# Altium PCB DE-020717.PcbDoc (part 1 of 3)
Units mil, origin at the board's own origin, x right, y up, seen from the top; angles counter-clockwise.
Board outline 2598.43 x 2598.43 mil, 4 copper layers (Top Layer, Power, Ground, Bottom Layer), stack 30.668 mil thick; 178 components, 180 nets, 707 pads, 289 vias.
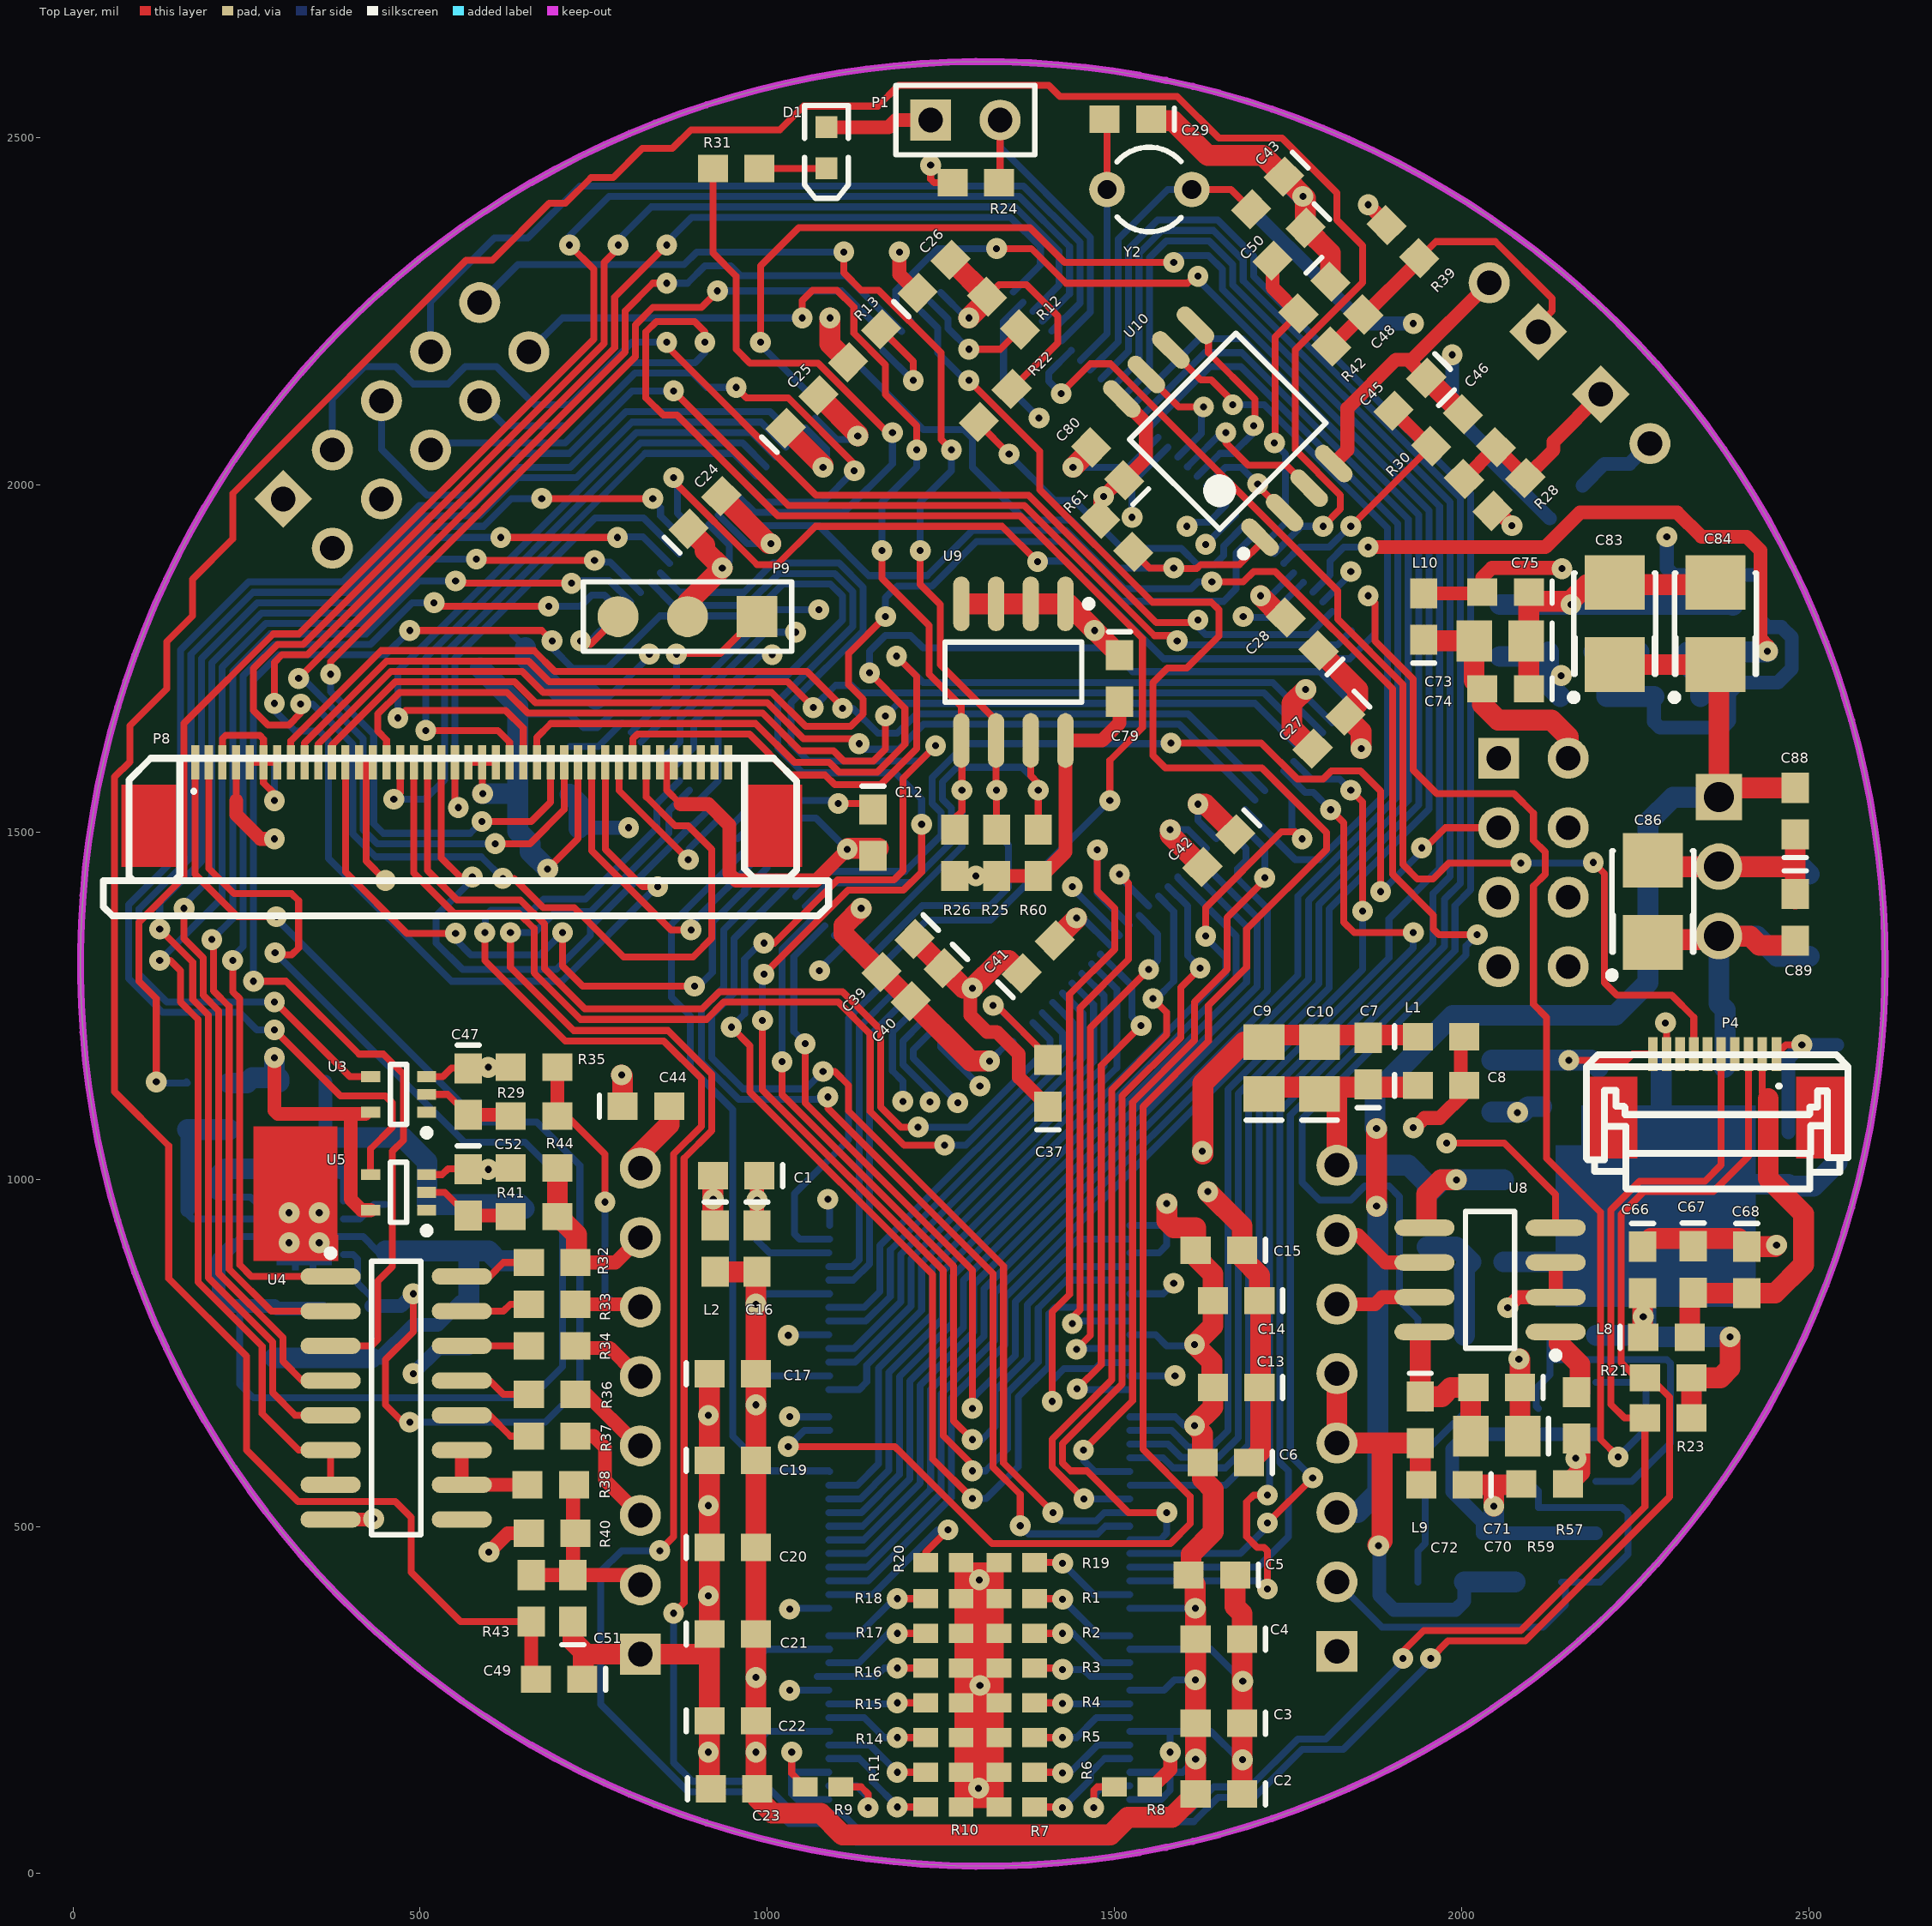
[diagram p0: Top Layer view]
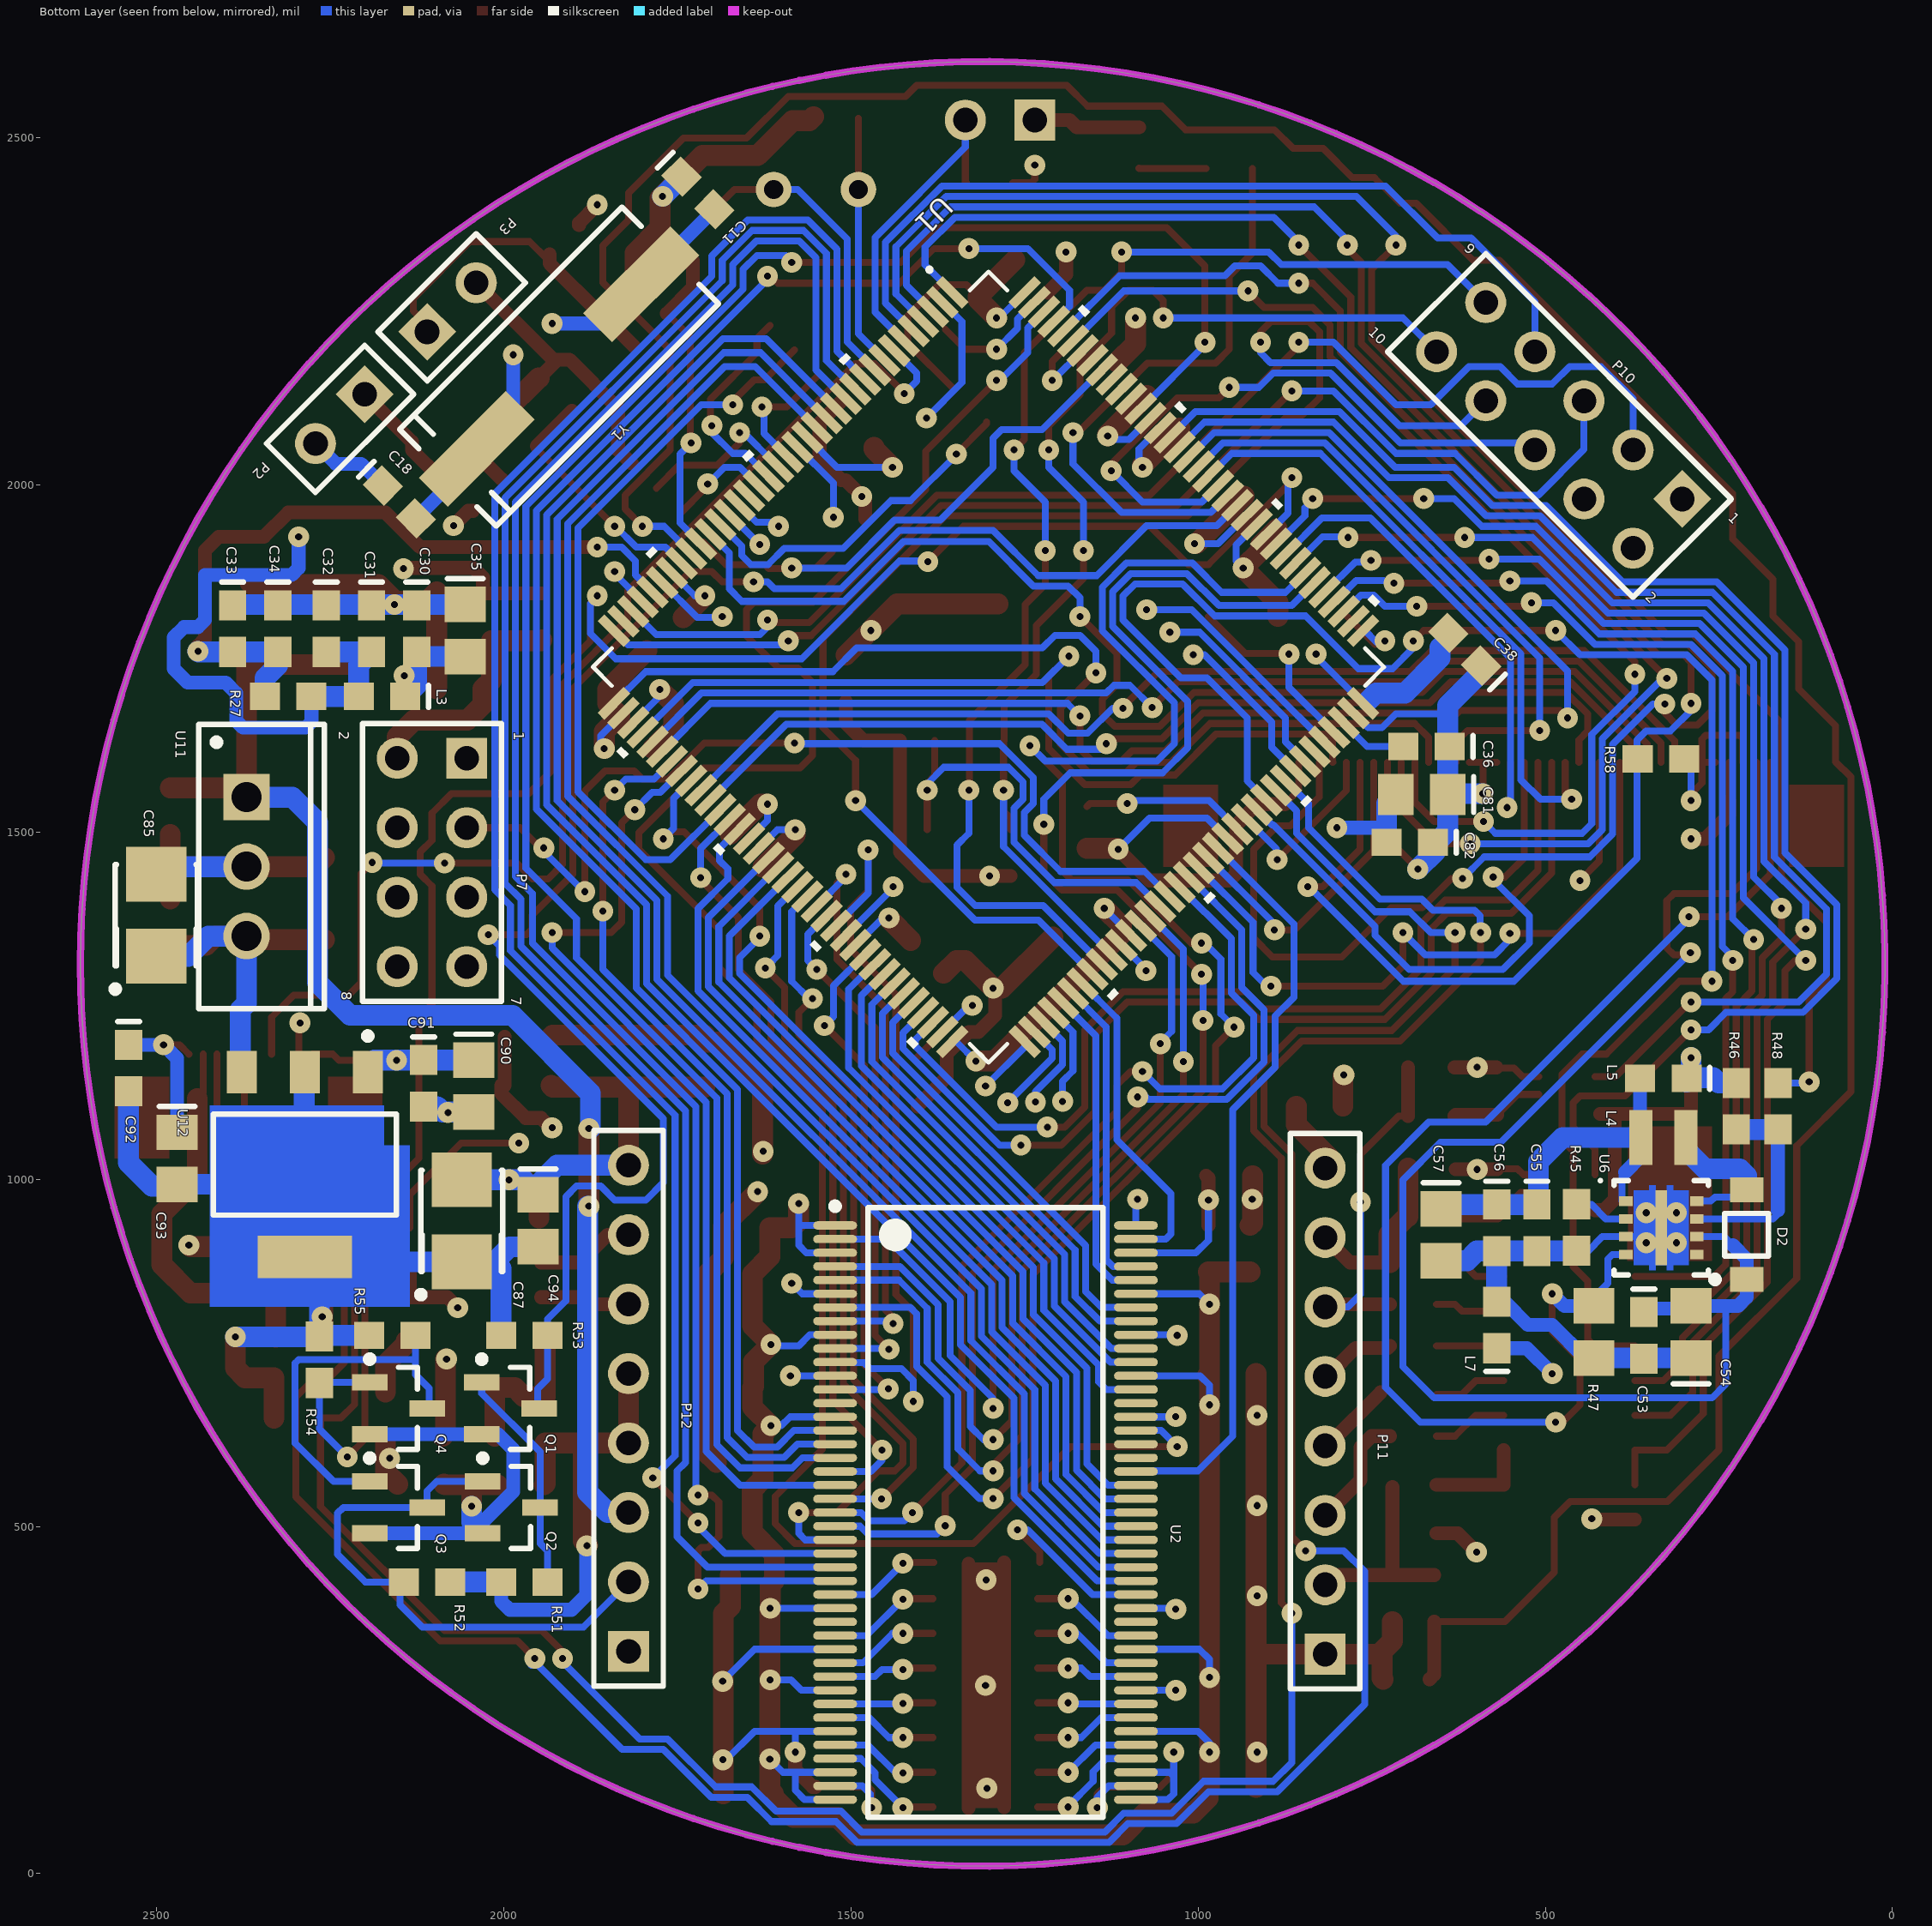
[diagram p1: Bottom Layer view, seen from below]
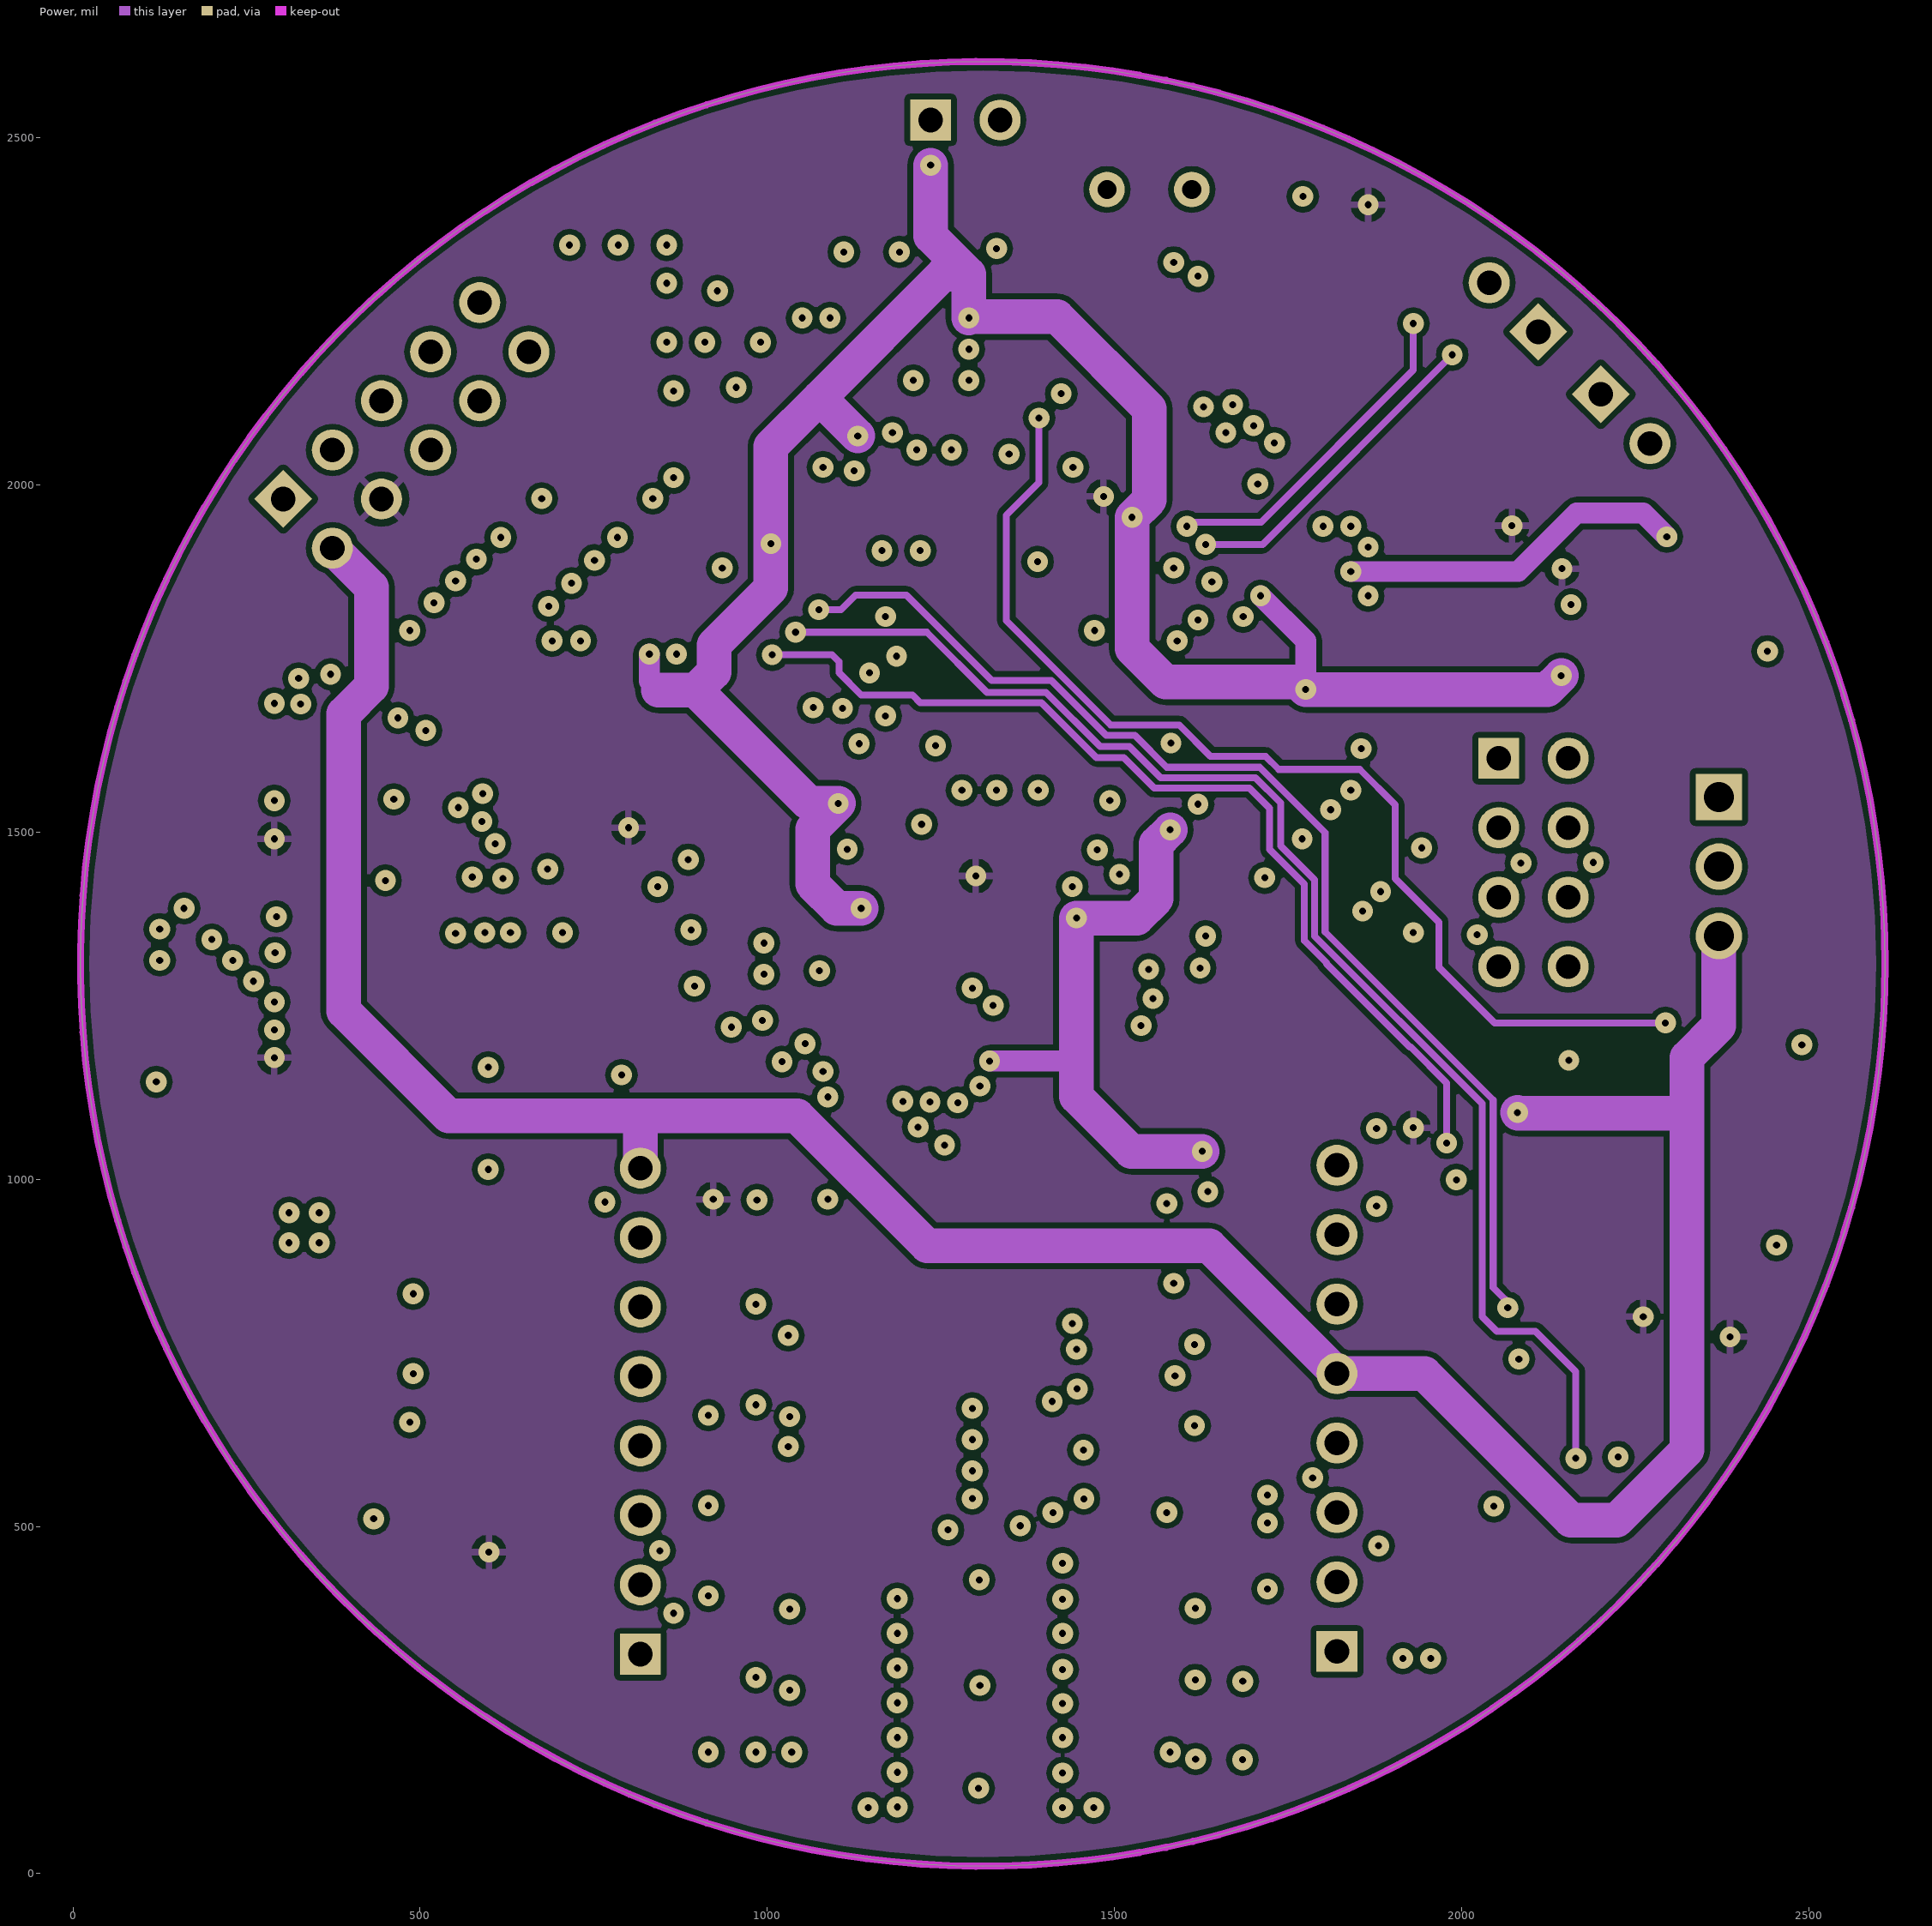
[diagram p2: Power]
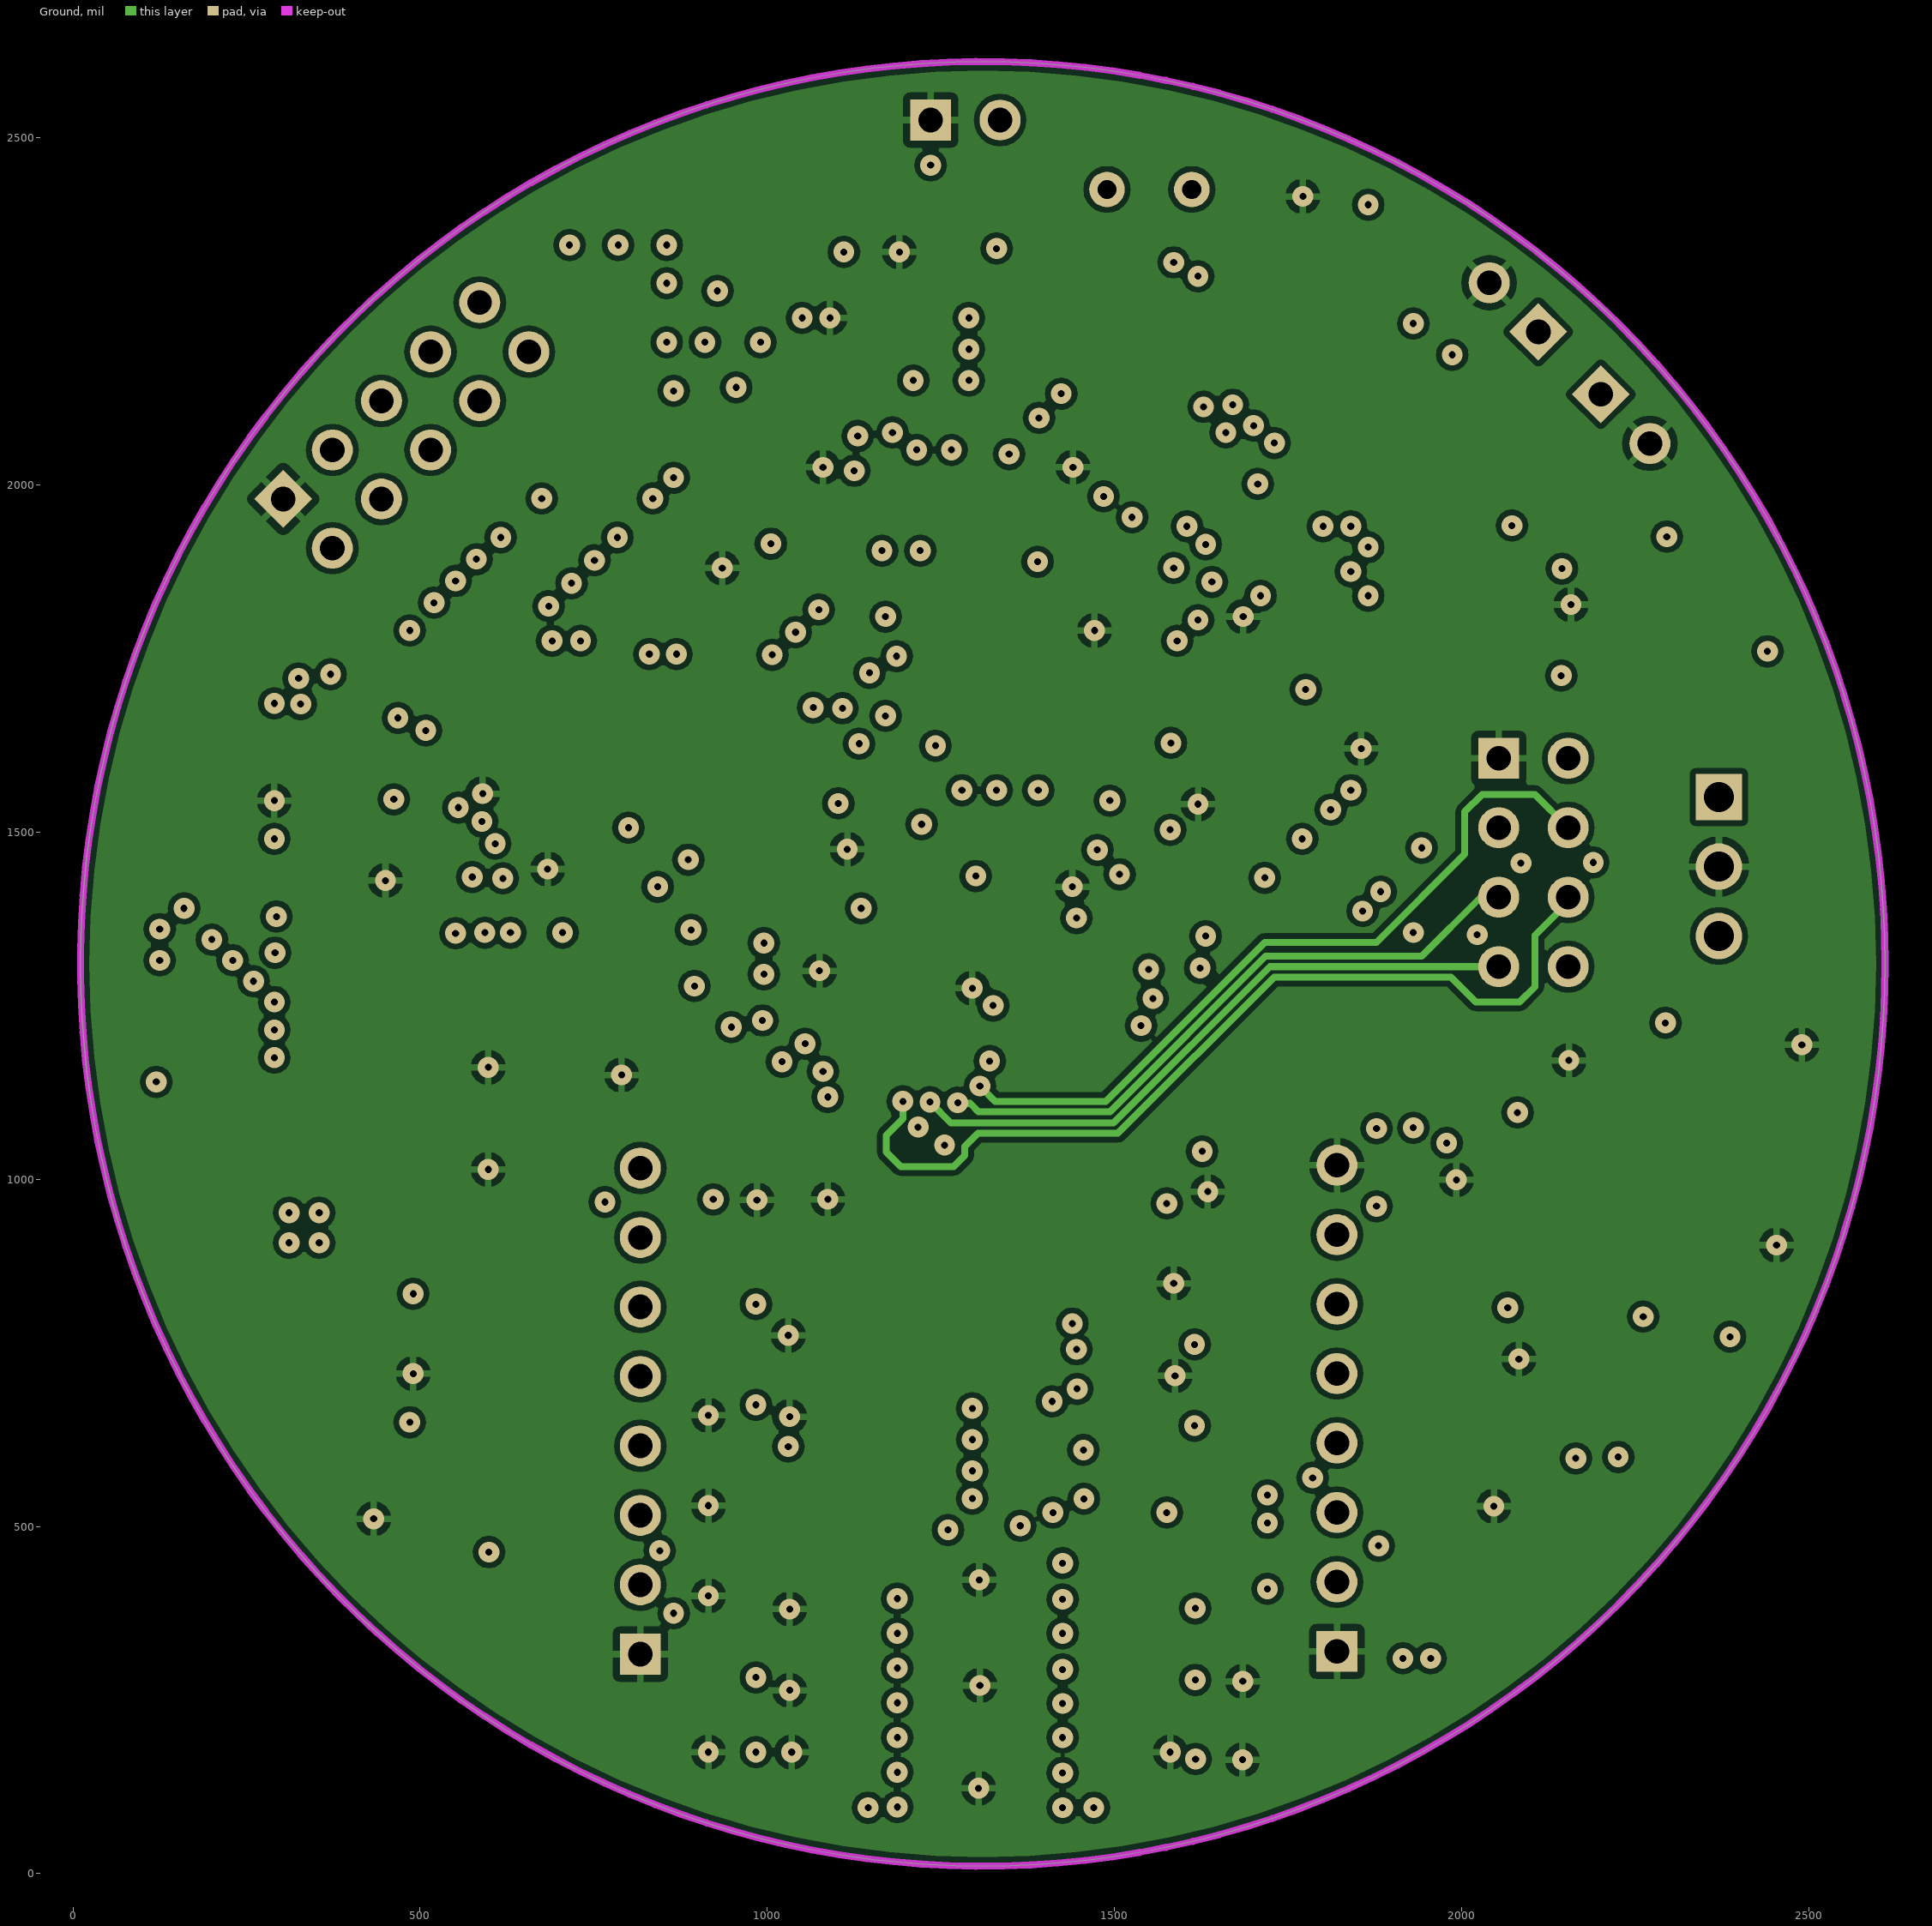
[diagram p3: Ground]

## Layer stack, top to bottom
Top Solder: solder mask 0.4, Solder Resist, Dk 3.5
Top Layer: signal copper 1.417
Dielectric 1: core 10, FR-4, Dk 4.2
Power: signal copper 1.417
Dielectric 3: prepreg 5, Dk 4.2
Ground: signal copper 1.417
Dielectric 2: core 10, Dk 4.2
Bottom Layer: signal copper 1.417
Bottom Solder: solder mask 0.4, Solder Resist, Dk 3.5

## Board outline
10.79,1310 ccw(c1310,1310) 1310,10.79 ccw(c1310,1310) 2609.21,1310 ccw(c1310,1310) 1310,2609.21 ccw(c1310,1310)

## Design rules (kind name [scope] priority, off if disabled: settings)
Clearance [All] p1: gap=1 ignorepadtopadclearanceinfootprint=FALSE except(0: Arc-Hole Track-Hole SMDPad-Hole THPad-Hole Via-Hole Fill-Hole Poly-Hole Region-Hole Text-Hole; 5: Track-Track; 8: Arc-Poly Track-Poly SMDPad-Poly THPad-Poly Via-Poly Fill-Poly Poly-Poly)
ComponentClearance [All] p1: gap=10 collisioncheckmode=3 verticalgap=10 showdistances=TRUE
ComponentOrientations [All] p1: allowedrotations=1
HoleToHoleClearance [All] p1: gap=0 allowstackedmicrovias=FALSE
LayerPairs [All] p1: enforce=FALSE
MinimumSolderMaskSliver [All] p1: minsoldermaskwidth=0
NetAntennae [All] p1: netantennaetolerance=5
PolygonConnect [All] p1: connectstyle=Relief reliefconductorwidth=10 reliefentries=4 polygonreliefangle="90 Angle" airgapwidth=10
RoutingVias [All] p1: holewidth=28 width=50 viastyle="Through Hole" minholewidth=10 minwidth=30 maxholewidth=70 maxwidth=100
SilkToSilkClearance [All] p1: silktosilkclearance=0
SilkToSolderMaskClearance [IsPad] p1: minsilkscreentomaskgap=0 clearancetoexposedcopper=TRUE
SolderMaskExpansion [All] p1: expansion=0
Width [All] p1: maxlimit=100 minlimit=10 preferedwidth=30
23 further rules are at their usual default settings.

## Classes and differential pairs
component class DE-020717_2: C53 C54 C55 C56 C57 C66 C67 C68 C70 C71 C72 C73 C74 C75 C79 C80 C81 C82 C83 C84 C85 C86 C87 C88 C89 C90 C91 C92 C93 C94 D2 L4 L5 L7 L8 L9 L10 P4 P7 P8 P10 P12 Q1 Q2 Q3 Q4 R45 R46 R47 R48 R51 R52 R53 R54 R55 R57 R58 R59 R60 R61 U6 U8 U9 U10 U11 U12
component class DE-020717_1: C1 C2 C3 C4 C5 C6 C7 C8 C9 C10 C11 C12 C13 C14 C15 C16 C17 C18 C19 C20 C21 C22 C23 C24 C25 C26 C27 C28 C29 C30 C31 C32 C33 C34 C35 C36 C37 C38 C39 C40 C41 C42 C43 C44 C45 C46 C47 C48 C49 C50 C51 C52 D1 L1 L2 L3 P1 P2 P3 P9 P11 R1 R2 R3 R4 R5 R6 R7 R8 R9 R10 R11 R12 R13 R14 R15 R16 R17 R18 R19 R20 R21 R22 R23 R24 R25 R26 R27 R28 R29 R30 R31 R32 R33 R34 R35 R36 R37 R38 R39 R40 R41 R42 R43 R44 U1 U2 U3 U4 U5 Y1 Y2

## Components (designator, comment, footprint, x,y, rotation, side; value= is the part's Value field where it differs from the comment)
C1 "100nF" 0603 955,1005 r180 top
C2 "100nF" 0603 1650,115 r180 top
C3 "100nF" 0603 1650,216.43 r180 top
C4 "100nF" 0603 1650,337.86 r180 top
C5 "100nF" 0603 1640,430 r180 top
C6 "100nF" 0603 1660,592 r180 top
C7 "100nF" 0603 1865,1170 r90 top
C8 "100nF" 0603 1970,1135 r0 top
C9 "C0805" 0805 1715,1160 r90 top value=4,7uF
C10 "C0805" 0805 1795,1160 r90 top value=4,7uF
C11 "C0603" 0603 1720,2420 r225 bottom value=20pF
C12 "100nF" 0603 1152,1499 r270 top
C13 "100nF" 0603 1675,700 r180 top
C14 "100nF" 0603 1675,825 r180 top
C15 "100nF" 0603 1650,897.43 r180 top
C16 "100nF" 0603 985,900 r270 top
C17 "100nF" 0603 950,720 r0 top
C18 "C0603" 0603 2150,1975 r225 bottom value=20pF
C19 "100nF" 0603 950,595 r0 top
C20 "100nF" 0603 950,470 r0 top
C21 "100nF" 0603 950,345 r0 top
C22 "100nF" 0603 950,220 r0 top
C23 "100nF" 0603 952,122 r0 top
C24 "100nF" 0603 910,1960 r45 top
C25 "100nF" 0603 1050,2105 r45 top
C26 "100nF" 0603 1240,2300 r45 top
C27 "100nF" 0603 1808.66,1643.66 r225 top
C28 "100nF" 0603 1770,1785 r135 top
C29 "C0603" 0603 1519,2526 r180 top value=4,7pF
C30 "100nF" 0603 2125,1792.6 r270 bottom
C31 "100nF" 0603 2190,1792.6 r270 bottom value=1uF
C32 "100nF" 0603 2255,1792.6 r270 bottom
C33 "100nF" 0603 2390,1792.6 r270 bottom value=1uF
C34 "100nF" 0603 2325,1792.6 r270 bottom
C35 "C0805" 0805 2055,1790 r270 bottom value=4,7uF
C36 "100nF" 0603 671,1623 r0 bottom value=2.2uF
C37 "100nF" 0603 1404,1138 r90 top value=2.2uF
C38 "100nF" 0603 616,1763 r45 bottom
C39 "100nF" 0603 1188,1322 r225 top
C40 "100nF" 0603 1230,1280 r225 top
C41 "100nF" 0603 1390,1320 r45 top
C42 "100nF" 0603 1650,1473 r225 top
C43 "C0603" 0603 1720,2420 r225 top value=4,7pF
C44 "100nF" 0603 825,1105 r0 top
C45 "100nF" 0603 1925,2130 r225 top value=1uF
C46 "100nF" 0603 2025.25,2077.77 r315 top value=1uF
C47 "C0603" 0603 569,1126 r270 top value=100pF
C48 "100nF" 0603 1834.33,2268.69 r315 top value=1uF
C49 "100nF" 0603 700,280 r180 top value=1uF
C50 "100nF" 0603 1751,2346 r225 top value=1uF
C51 "100nF" 0603 720,396.54 r90 top value=1uF
C52 "C0603" 0603 569,981 r270 top value=100pF
C53 "100nF" 0603 358,775 r270 bottom
C54 "4u7" 0805 290,780 r90 bottom
C55 "100nF" 0603 512,930 r270 bottom
C56 "100nF" 0603 570,930 r270 bottom value=10nF
C57 "4u7" 0805 650,920 r270 bottom
C66 "100nF" 0603 2260,869.37 r270 top
C67 "1uF" 0603 2333,870 r270 top value=100nF
C68 "100nF" 0603 2410,869.37 r270 top
C70 "4u7" 0805 2050,630 r180 top value=10uF
C71 "100nF" 0603 2050,700 r180 top
C72 "100nF" 0603 1975,560 r180 top
C73 "4u7" 0805 2055,1775 r180 top value=10uF
C74 "100nF" 0603 2062.87,1706 r180 top
C75 "100nF" 0603 2062.87,1845.43 r180 top
C79 "100nF" 0603 1507,1721 r270 top
C80 "100nF" 0603 1490,2030 r135 top
C81 "4u7" 0805 678,1554 r0 bottom
C82 "100nF" 0603 695,1485 r0 bottom
C83 "22uF/16V" 3528 2220,1800 r90 top
C84 "22uF/16V" 3528 2365,1800 r90 top
C85 "47uF/10V" 3528 2500,1380 r90 bottom
C86 "47uF/10V" 3528 2275,1400 r90 top
C87 "100uF" 3528 2060,940 r90 bottom value=100uF/6,3V
C88 "100nF" 0603 2480,1530 r90 top
C89 "100nF" 0603 2480,1377 r270 top
C90 "10uF" 0805 2043,1134 r270 bottom
C91 "100nF" 0603 2115,1138 r270 bottom
C92 "100nF" 0603 2540,1160 r270 bottom
C93 "10uF" 0805 2470,1030 r270 bottom
C94 "10uF" 0805 1950,940 r270 bottom
D1 "HSMH-C190" 1.6X0.8X0.8A 1085,2485 r270 top
D2 "STPS1L40M" ONSC-SOD-123-2-425-04_V 210,920 r90 bottom
L1 "BLM15AG121" 0603 1970,1205 r0 top
L2 "BLM15AG121" 0603 925,900 r270 top
L3 "BLM15AG121" 0603 2175,1695 r0 bottom
L4 "74404024047" "WE-LQS 252012" 330,1060 r180 bottom
L5 "BLM15AG121" 0603 330,1145 r0 bottom
L7 "BLM15AG121" 0603 570,790 r90 bottom
L8 "BLM15AG121" 0603 2294.49,772.24 r0 top
L9 "BLM15AG121" 0603 1940,653.46 r270 top
L10 "BLM15AG121" 0603 1945,1810 r90 top
P1 "3VBAT" HDR1X2 1235,2525 r0 top
P2 "AMBIENT_LIGHT" HDR1X2 2200,2130 r315 bottom
P3 "AMBIENT_TEMPERATURE" HDR1X2 2110,2220 r135 bottom
P4 "TOUCH_SCREEN" "10 pin PFC" 2460,1205 r180 top locked
P7 "nRF24L01" HDR2X4 2053,1606 r270 bottom
P8 "480x272 RGB TFT LCD AML043056B0-40" "40 pin FPC" 950,1625 r180 top
P9 "ST-Link Debbuger" HDR1X3 985,1810 r180 top
P10 "EXPAND" HDR2X5 302.87,1979.29 r45 bottom
P11 "FANCOIL_INTERFACE" HDR1X8 817,316 r90 bottom
P12 "POWER_&_COM" HDR1X8 1820,320 r90 bottom
Q1 "2N7002" SOT23_N 1990,670 r180 bottom
Q2 "2N7002" SOT23_N 1988.66,527.4 r180 bottom
Q3 "2N7002" SOT23_N 2151.34,527.4 r180 bottom
Q4 "2N7002" SOT23_N 2151.34,670 r180 bottom
R1 "10K" 2-0402 1359,396 r180 top
R2 "10K" 2-0402 1359,346 r180 top
R3 "10K" 2-0402 1359,296 r180 top
R4 "10K" 2-0402 1359,246 r180 top
R5 "10K" 2-0402 1359,196 r180 top
R6 "10K" 2-0402 1359,146 r180 top
R7 "10K" 2-0402 1359,96 r180 top
R8 "10K" 2-0402 1525,125 r0 top
R9 "10K" 2-0402 1080,125 r180 top
R10 "10K" 2-0402 1253.41,96 r0 top
R11 "10K" 2-0402 1253.41,146 r0 top
R12 "10K" ERA-0603 1340,2247 r135 top
R13 "10K" ERA-0603 1140,2200 r225 top
R14 "10K" 2-0402 1253.41,196 r0 top
R15 "10K" 2-0402 1253.41,246 r0 top
R16 "10K" 2-0402 1253.41,296 r0 top
R17 "10K" 2-0402 1253.41,346 r0 top
R18 "10K" 2-0402 1253.41,396 r0 top
R19 "10K" 2-0402 1359,448 r180 top
R20 "10K" 2-0402 1253.41,448 r0 top
R21 "2K7" ERA-0603 2297,714 r180 top
R22 "10K" ERA-0603 1328,2114 r45 top
R23 "2K7" ERA-0603 2297,656 r180 top
R24 "0R" ERA-0603 1300,2435 r0 top
R25 "2K7" ERA-0603 1330,1470 r90 top
R26 "2K7" ERA-0603 1270,1470 r90 top
R27 "0R" ERA-0603 2310,1695 r0 bottom
R28 "10K" ERA-0603 2067.67,1985.85 r225 top
R29 "560R" ERA-0603 664,1091 r180 top
R30 "1K" ERA-0603 1979.29,2031.81 r315 top
R31 "330R" ERA-0603 955,2455 r180 top
R32 "NF" ERA-0603 690,880 r0 top
R33 "NF" ERA-0603 690,820 r0 top
R34 "0R" ERA-0603 690,760 r0 top
R35 "220R" ERA-0603 664,1161 r0 top
R36 "0R" ERA-0603 690,690 r0 top
R37 "0R" ERA-0603 690,630 r0 top
R38 "NF" ERA-0603 688,560 r0 top
R39 "10K" ERA-0603 1915,2350 r315 top
R40 "2K2" ERA-0603 690,490 r180 top
R41 "560R" ERA-0603 664,946 r180 top
R42 "1K" ERA-0603 1788.37,2222.73 r315 top
R43 "1K" ERA-0603 660,396.54 r90 top
R44 "220R" ERA-0603 664,1016 r0 top
R45 "100K" ERA-0603 455,930.46 r270 bottom
R46 "4K7" ERA-0603 225,1105 r90 bottom
R47 "10R" ERA-0805 430,780 r90 bottom
R48 "0R" ERA-0603 165,1105 r90 bottom
R51 "2K2" ERA-0603 1970,420 r180 bottom
R52 "2K2" ERA-0603 2110,420 r180 bottom
R53 "2K2" ERA-0603 1970,775 r180 bottom
R54 "2K2" ERA-0603 2265,740 r90 bottom
R55 "2K2" ERA-0603 2160,775 r0 bottom
R57 "1K2" ERA-0603 2165,660 r90 top
R58 "4K7" ERA-0603 333.48,1605 r0 bottom
R59 "2K2" ERA-0603 2119,561 r180 top
R60 "10K" ERA-0603 1390,1470 r90 top
R61 "10K" ERA-0603 1503,1927 r315 top
U1 "STM32F746ZET" LQFP-144_20X20mm 1301.74,1737.31 r225 bottom value=Value
U2 "MT48LC4M32B2P-6A" MICT-P-86_N 1306,520 r180 bottom
U3 "MC74VHC1GT14DFT1" 419A-01_N 469,1122 r180 top
U4 "ULN2003A" SO16_N 465.51,685 r0 top
U5 "MC74VHC1GT14DFT1" 419A-01_N 469,981 r180 top
U6 "STLD40DPUR" QFN8_V 333,930 r180 bottom
U8 "MAX485CSA" NSO8_N 2040.51,855 r180 top
U9 "M24128RMN1" SOP8_N 1354.14,1730 r270 top
U10 "N25Q128A13ESE40E" MICT-SE-8_N 1662.8,2076.85 r135 top
U11 "DC/DC BUCK" TO220 2370,1450 r270 bottom
U12 "REG1117-3.3" ZZ311 2286,1021 r0 bottom
Y1 "ECS-110-S-5P" CSM-7 1920,2170 r135 bottom value=8MHz
Y2 "RTC" R38 1550,2425 r270 top value=32,768kHz

## Footprints (in the part's own frame and the unit in brackets; to place one, negate y for a bottom-side part, rotate by r counter-clockwise, add the part's x,y. Pads: shape width x height; smd on the part's side, far side on the other; paste and mask are expansions set on the pad)
1.6X0.8X0.8A [mm] "SM LED; 2 Flat Leads"
  rect 0.8x0.8 smd: 1(0.75,0) 2(-0.75,0)
  silkscreen extent -1.55,-0.8 1.85,0.8, body extent -1.65,-0.9 1.95,0.9, height 0.7
2-0402 [mm] "Chip Resistor; Body 1 x 0.5 mm (LxW typ)"
  rect 0.9x0.7 smd: 1(-0.65,0) 2(0.65,0)
  body extent -1.2,-0.45 1.2,0.45, height 0.4
"10 pin PFC" [mm]
  rect 0.35x1.25 smd: 1(0.178,0.635) 2(0.703,0.635) 3(1.203,0.635) 4(1.703,0.635) 5(2.203,0.635) 6(2.703,0.635) 7(3.203,0.635) 8(3.703,0.635) 9(4.203,0.635) 10(4.703,0.635)
  Top Layer region: 5.258,1.45 7.258,1.45 7.258,4.45 5.258,4.45
  Top Layer region: -2.54,1.45 -0.54,1.45 -0.54,4.45 -2.54,4.45
  silkscreen extent -2.44,0.66 7.14,5.56, body extent -2.57,0.01 7.26,5.69, height 6
"40 pin FPC" [mm]
  rect 0.3x1.25 smd: 1(19.66,0.635) 2(19.16,0.635) 3(18.66,0.635) 4(18.16,0.635) 5(17.66,0.635) 6(17.16,0.635) 7(16.66,0.635) 8(16.16,0.635) 9(15.66,0.635) 10(15.16,0.635) 11(14.66,0.635) 12(14.16,0.635) 13(13.66,0.635) 14(13.16,0.635) 15(12.66,0.635) 16(12.16,0.635) 17(11.66,0.635) 18(11.16,0.635) 19(10.66,0.635) 20(10.16,0.635) 21(9.66,0.635) 22(9.16,0.635) 23(8.66,0.635) 24(8.16,0.635) 25(7.66,0.635) 26(7.16,0.635) 27(6.66,0.635) 28(6.16,0.635) 29(5.66,0.635) 30(5.16,0.635) 31(4.66,0.635) 32(4.16,0.635) 33(3.66,0.635) 34(3.16,0.635) 35(2.66,0.635) 36(2.16,0.635) 37(1.66,0.635) 38(1.16,0.635) 39(0.66,0.635) 40(0.16,0.635)
  Top Layer region: 20.352,1.45 22.352,1.45 22.352,4.45 20.352,4.45
  Top Layer region: -2.54,1.45 -0.54,1.45 -0.54,4.45 -2.54,4.45
  silkscreen extent -3.51,0.48 23.01,6.25
419A-01_N [mm] "SOT353, 5-Leads, Body 2x1.3mm, Pitch 0.65mm, Lead Span 2.1mm, IPC Medium Density"
  rect 0.7x0.4 smd: 1(-1.025,0.65) 2(-1.025,0) 3(-1.025,-0.65) 4(1.025,-0.65) 5(1.025,0.65)
  silkscreen extent -1.15,-1.1 0.3,1.52, body extent -1.68,-1.4 1.68,1.65, height 1.1
0603 [mm] "Chip Capacitor; Body 1.6 x 0.8 mm (LxW typ)"
  rect 1.1x1 smd: 1(-0.85,0) 2(0.85,0)
  silkscreen extent -1.7,-0.4 -1.7,0.4, body extent -1.8,-0.6 1.5,0.6, height 0.87
0805 [mm] "Chip Capacitor; Body 2.0 x 1.2 mm (LxW typ)"
  rect 1.3x1.5 smd: 1(-0.95,0) 2(0.95,0)
  silkscreen extent -1.9,-0.65 -1.9,0.65, body extent -2,-0.85 1.7,0.85, height 1.3
3528 [mm] "Capacitor, SM Tantalum; Body 3.5 x 2.8 mm (LxW typ)"
  rect 2x2.2 smd: 1(-1.5,0) 2(1.5,0)
  silkscreen extent -2.82,-1.5 1.85,1.62, body extent -2.95,-1.6 2.6,1.75, height 2.1
CSM-7 [mm] "Quartz Crystal, SM; 2 Leads; Body 11.4 x 4.8 x 5 mm (LxWxH)"
  rect 4.5x1.5 smd: 1(-4.25,0) 2(4.25,0)
  silkscreen extent -5.75,-2.5 5.75,2.5, body extent -5.85,-2.6 5.85,2.6, height 5
ERA-0603 [mm] "Chip Resistor; Body 1.6 x 0.8 mm (LxW typ)"
  rect 1.1x1 smd: 1(-0.85,0) 2(0.85,0)
  body extent -1.5,-0.6 1.5,0.6, height 0.55
ERA-0805 [mm] "Chip Resistor; Body 2 x 1.3 mm (LxW typ)"
  rect 1.3x1.5 smd: 1(-0.95,0) 2(0.95,0)
  body extent -1.7,-0.85 1.7,0.85, height 0.6
HDR1X2 [mm] "Connector; Header; 2 Position"
  rect 1.5x1.5 hole 0.9: 1(0,0)
  round 1.5 hole 0.9: 2(2.54,0)
  silkscreen extent -1.27,-1.27 3.81,1.27, body extent -1.37,-1.37 3.91,1.37, height 6
HDR1X3 [mm] "Connector; Header; 3 Position"
  rect 1.5x1.5 smd: 1(0,0)
  round 1.5 smd: 2(2.54,0) 3(5.08,0)
  silkscreen extent -1.27,-1.27 6.35,1.27, body extent -1.37,-1.37 6.45,1.37
HDR1X8 [mm] "Connector; Header; 8 Position"
  rect 1.5x1.5 hole 0.9: 1(0,0)
  round 1.5 hole 0.9: 2(2.54,0) 3(5.08,0) 4(7.62,0) 5(10.16,0) 6(12.7,0) 7(15.24,0) 8(17.78,0)
  silkscreen extent -1.27,-1.27 19.05,1.27, body extent -1.37,-1.37 19.15,1.37, height 6
HDR2X4 [mm] "Connector; Header; 4x2 Position"
  rect 1.5x1.5 hole 0.9: 1(0,0)
  round 1.5 hole 0.9: 2(0,-2.54) 3(2.54,0) 4(2.54,-2.54) 5(5.08,0) 6(5.08,-2.54) 7(7.62,0) 8(7.62,-2.54)
  silkscreen extent -1.27,-3.81 8.89,1.27, body extent -1.37,-3.91 8.99,1.37, height 6
HDR2X5 [mm] "Connector; Header; 5x2 Position"
  rect 1.5x1.5 hole 0.9: 1(0,0)
  round 1.5 hole 0.9: 2(0,2.54) 3(2.54,0) 4(2.54,2.54) 5(5.08,0) 6(5.08,2.54) 7(7.62,0) 8(7.62,2.54) 9(10.16,0) 10(10.16,2.54)
  silkscreen extent -1.27,-1.27 11.43,3.81, body extent -1.37,-1.37 11.53,3.91, height 6
LQFP-144_20X20mm [mm] "STM32F746ZET ARM Cortex M7 microcontroller"
  rect 1.35x0.35 smd: 1(-10.625,8.75) 2(-10.625,8.25) 3(-10.625,7.75) 4(-10.625,7.25) 5(-10.625,6.75) 6(-10.625,6.25) 7(-10.625,5.75) 8(-10.625,5.25) 9(-10.625,4.75) 10(-10.625,4.25) 11(-10.625,3.75) 12(-10.625,3.25) 13(-10.625,2.75) 14(-10.625,2.25) 15(-10.625,1.75) 16(-10.625,1.25) 17(-10.625,0.75) 18(-10.625,0.25) 19(-10.625,-0.25) 20(-10.625,-0.75) 21(-10.625,-1.25) 22(-10.625,-1.75) 23(-10.625,-2.25) 24(-10.625,-2.75) 25(-10.625,-3.25) 26(-10.625,-3.75) 27(-10.625,-4.25) 28(-10.625,-4.75) 29(-10.625,-5.25) 30(-10.625,-5.75) 31(-10.625,-6.25) 32(-10.625,-6.75) 33(-10.625,-7.25) 34(-10.625,-7.75) 35(-10.625,-8.25) 36(-10.625,-8.75) 73(10.625,-8.75) 74(10.625,-8.25) 75(10.625,-7.75) 76(10.625,-7.25) 77(10.625,-6.75) 78(10.625,-6.25) 79(10.625,-5.75) 80(10.625,-5.25) 81(10.625,-4.75) 82(10.625,-4.25) 83(10.625,-3.75) 84(10.625,-3.25) 85(10.625,-2.75) 86(10.625,-2.25) 87(10.625,-1.75) 88(10.625,-1.25) 89(10.625,-0.75) 90(10.625,-0.25) 91(10.625,0.25) 92(10.625,0.75) 93(10.625,1.25) 94(10.625,1.75) 95(10.625,2.25) 96(10.625,2.75) 97(10.625,3.25) 98(10.625,3.75) 99(10.625,4.25) 100(10.625,4.75) 101(10.625,5.25) 102(10.625,5.75) 103(10.625,6.25) 104(10.625,6.75) 105(10.625,7.25) 106(10.625,7.75) 107(10.625,8.25) 108(10.625,8.75)
  rect 0.35x1.35 smd: 37(-8.75,-10.625) 38(-8.25,-10.625) 39(-7.75,-10.625) 40(-7.25,-10.625) 41(-6.75,-10.625) 42(-6.25,-10.625) 43(-5.75,-10.625) 44(-5.25,-10.625) 45(-4.75,-10.625) 46(-4.25,-10.625) 47(-3.75,-10.625) 48(-3.25,-10.625) 49(-2.75,-10.625) 50(-2.25,-10.625) 51(-1.75,-10.625) 52(-1.25,-10.625) 53(-0.75,-10.625) 54(-0.25,-10.625) 55(0.25,-10.625) 56(0.75,-10.625) 57(1.25,-10.625) 58(1.75,-10.625) 59(2.25,-10.625) 60(2.75,-10.625) 61(3.25,-10.625) 62(3.75,-10.625) 63(4.25,-10.625) 64(4.75,-10.625) 65(5.25,-10.625) 66(5.75,-10.625) 67(6.25,-10.625) 68(6.75,-10.625) 69(7.25,-10.625) 70(7.75,-10.625) 71(8.25,-10.625) 72(8.75,-10.625) 109(8.75,10.625) 110(8.25,10.625) 111(7.75,10.625) 112(7.25,10.625) 113(6.75,10.625) 114(6.25,10.625) 115(5.75,10.625) 116(5.25,10.625) 117(4.75,10.625) 118(4.25,10.625) 119(3.75,10.625) 120(3.25,10.625) 121(2.75,10.625) 122(2.25,10.625) 123(1.75,10.625) 124(1.25,10.625) 125(0.75,10.625) 126(0.25,10.625) 127(-0.25,10.625) 128(-0.75,10.625) 129(-1.25,10.625) 130(-1.75,10.625) 131(-2.25,10.625) 132(-2.75,10.625) 133(-3.25,10.625) 134(-3.75,10.625) 135(-4.25,10.625) 136(-4.75,10.625) 137(-5.25,10.625) 138(-5.75,10.625) 139(-6.25,10.625) 140(-6.75,10.625) 141(-7.25,10.625) 142(-7.75,10.625) 143(-8.25,10.625) 144(-8.75,10.625)
  silkscreen extent -11.88,-11.81 11.81,11.81, body extent -11.96,-11.88 11.88,11.88, height 0
MICT-P-86_N [mm] "SOP, 86-Leads, Body 22.22x10.6mm, Pitch 0.5mm, , IPC Medium Density"
  oval 1.6x0.3 smd: 1(-5.5,10.5) 2(-5.5,10) 3(-5.5,9.5) 4(-5.5,9) 5(-5.5,8.5) 6(-5.5,8) 7(-5.5,7.5) 8(-5.5,7) 9(-5.5,6.5) 10(-5.5,6) 11(-5.5,5.5) 12(-5.5,5) 13(-5.5,4.5) 14(-5.5,4) 15(-5.5,3.5) 16(-5.5,3) 17(-5.5,2.5) 18(-5.5,2) 19(-5.5,1.5) 20(-5.5,1) 21(-5.5,0.5) 22(-5.5,0) 23(-5.5,-0.5) 24(-5.5,-1) 25(-5.5,-1.5) 26(-5.5,-2) 27(-5.5,-2.5) 28(-5.5,-3) 29(-5.5,-3.5) 30(-5.5,-4) 31(-5.5,-4.5) 32(-5.5,-5) 33(-5.5,-5.5) 34(-5.5,-6) 35(-5.5,-6.5) 36(-5.5,-7) 37(-5.5,-7.5) 38(-5.5,-8) 39(-5.5,-8.5) 40(-5.5,-9) 41(-5.5,-9.5) 42(-5.5,-10) 43(-5.5,-10.5) 44(5.5,-10.5) 45(5.5,-10) 46(5.5,-9.5) 47(5.5,-9) 48(5.5,-8.5) 49(5.5,-8) 50(5.5,-7.5) 51(5.5,-7) 52(5.5,-6.5) 53(5.5,-6) 54(5.5,-5.5) 55(5.5,-5) 56(5.5,-4.5) 57(5.5,-4) 58(5.5,-3.5) 59(5.5,-3) 60(5.5,-2.5) 61(5.5,-2) 62(5.5,-1.5) 63(5.5,-1) 64(5.5,-0.5) 65(5.5,0) 66(5.5,0.5) 67(5.5,1) 68(5.5,1.5) 69(5.5,2) 70(5.5,2.5) 71(5.5,3) 72(5.5,3.5) 73(5.5,4) 74(5.5,4.5) 75(5.5,5) 76(5.5,5.5) 77(5.5,6) 78(5.5,6.5) 79(5.5,7) 80(5.5,7.5) 81(5.5,8) 82(5.5,8.5) 83(5.5,9) 84(5.5,9.5) 85(5.5,10) 86(5.5,10.5)
  silkscreen extent -5.63,-11.15 4.3,11.32, body extent -6.57,-11.42 6.57,11.45, height 1.2
MICT-SE-8_N [mm] "SOIC, 8-Leads, Body 5.5x5.5mm, Pitch 1.27mm, IPC Medium Density"
  oval 1.7x0.6 smd: 1(-3.575,1.905) 2(-3.575,0.635) 3(-3.575,-0.635) 4(-3.575,-1.905) 5(3.575,-1.905) 6(3.575,-0.635) 7(3.575,0.635) 8(3.575,1.905)
  silkscreen extent -3.7,-2.75 2.33,2.88, body extent -4.68,-3.02 4.68,3.02, height 6
NSO8_N [mm] "SOIC, 8-Leads, Body 4.9x3.9mm, Pitch 1.27mm, IPC Medium Density"
  oval 2.2x0.6 smd: 1(-2.4,1.905) 2(-2.4,0.635) 3(-2.4,-0.635) 4(-2.4,-1.905) 5(2.4,-1.905) 6(2.4,-0.635) 7(2.4,0.635) 8(2.4,1.905)
  silkscreen extent -2.53,-2.5 0.9,2.88, body extent -3.8,-2.8 3.8,3.01, height 1.75
ONSC-SOD-123-2-425-04_V [mm] "SOD, 2-Leads, Body 2.69x1.6mm"
  rect 0.91x1.22 smd: 1(-1.635,0) 2(1.635,0)
  silkscreen extent -1.76,-0.8 0.78,1.29, body extent -1.35,-0.8 1.35,0.8, height 1.35
QFN8_V [mm] "SON, 8-Leads, Body 3x3mm, Pitch 0.65mm, Thermal Pad 2.74x2mm, ST Recommended"
  rect 0.5x0.35 smd: 1(-1.3,0.975) 2(-1.3,0.325) 3(-1.3,-0.325) 4(-1.3,-0.975) 5(1.3,-0.975) 6(1.3,-0.325) 7(1.3,0.325) 8(1.3,0.975)
  rect 0.42x2.74 smd paste+0 mask+0: 9(0,0)
  Top Layer region: -0.44,-1.55 -0.44,-1.37 -1,-1.37 -1,1.37 -0.44,1.37 -0.44,1.55 -0.21,1.55 -0.21,1.37 0.21,1.37 0.21,1.55 0.44,1.55 0.44,1.37 1,1.37 1,-1.37 0.44,-1.37 0.44,-1.55 0.21,-1.55 0.21,-1.37 -0.21,-1.37 -0.21,-1.55
  silkscreen extent -2.27,-1.72 1.73,1.78, body extent -2.32,-1.82 1.83,1.83, height 1
R38 [mm] "Crystal, Thru-Hole; 2 Leads; Body 3.1 x 8.2 mm (Dia.xH)"
  round 1.3 hole 0.7: 1(0,1.55) 2(0,-1.55)
  silkscreen extent -1.55,-1.19 1.55,1.17, body extent -1.65,-2.3 1.65,2.3, height 8.2
SO16_N [mm] "SOIC, 16-Leads, Body 9.9x3.9mm, Pitch 1.27mm, IPC Medium Density"
  oval 2.2x0.6 smd: 1(-2.4,4.445) 2(-2.4,3.175) 3(-2.4,1.905) 4(-2.4,0.635) 5(-2.4,-0.635) 6(-2.4,-1.905) 7(-2.4,-3.175) 8(-2.4,-4.445) 9(2.4,-4.445) 10(2.4,-3.175) 11(2.4,-1.905) 12(2.4,-0.635) 13(2.4,0.635) 14(2.4,1.905) 15(2.4,3.175) 16(2.4,4.445)
  silkscreen extent -2.52,-5 0.9,5.42, body extent -3.8,-5.3 3.8,5.55, height 1.75
SOP8_N [mm] "SOIC, 8-Leads, Body 4.9x3.9mm, Pitch 1.27mm, IPC Medium Density"
  oval 2x0.6 smd: 1(-2.5,1.905) 2(-2.5,0.635) 3(-2.5,-0.635) 4(-2.5,-1.905) 5(2.5,-1.905) 6(2.5,-0.635) 7(2.5,0.635) 8(2.5,1.905)
  silkscreen extent -2.62,-2.5 1.1,2.88, body extent -3.8,-2.8 3.8,3.01, height 1.75
SOT23_N [mm] "SOT23, 3-Leads, Body 2.9x1.3mm, Pitch 0.95mm, Lead Span 2.3mm, IPC Medium Density"
  rect 1.3x0.6 smd: 1(-1.05,0.95) 2(-1.05,-0.95) 3(1.05,0)
  silkscreen extent -1.18,-1.5 0.7,1.92, body extent -0.7,-1.5 0.7,1.5, height 1.1
TO220 [mm] "TO, Thru-Hole, Vertical, Heatsink Mounted; 3 In-Line Leads; Pitch 2.54 mm"
  rect 1.7x1.7 hole 1.1: 1(-2.54,0)
  round 1.7 hole 1.1: 2(0,0) 3(2.54,0)
  silkscreen extent -5.2,-1.75 5.2,2.85, body extent -5.3,-1.85 5.3,2.95, height 19.7
"WE-LQS 252012" [mm] "SMD Power Inductor, 2-Leads, Body 2.5x2.0mm"
  rect 0.85x2 smd: 1(-0.825,0) 2(0.825,0)
  body extent -1.55,-1.3 1.55,1.3, height 1.2
ZZ311 [mm] "SOT-223/SC-73; 4 Leads; Body 6.7 x 7.3 mm, inc. leads (LxW max)"
  rect 1.1x1.55 smd: 1(-2.3,-3.375) 2(0,-3.375) 3(2.3,-3.375)
  rect 3.45x1.55 smd: 4(0,3.375)
  silkscreen extent -3.35,-4.82 3.35,1.85, body extent -3.45,-4.95 3.45,4.15, height 1.8

## Part data
C1 C2 C3 C4 C5 C6 C7 C8 C12 C13 C14 C15 C16 C17 C19 C20 C21 C22 C23 C24 C25 C26 C27 C28 C30 C31 C32 C33 C34 C36 C37 C38 C39 C40 C41 C42 C44 C45 C46 C48 C49 C50 C51 C53 C55 C56 C66 C67 C68 C71 C72 C74 C75 C79 C80 C82 C88 C89 C91 C92: library part C0603, "Ceramic Chip Capacitor - Standard", PackageDocument=Mar-2001, Code_IPC="1608 [0603]", Code_JEITA=0603, ComponentLink1Description="Manufacturer Link", ComponentLink1URL=http://www.kemet.com/, ComponentLink2Description=Datasheet, ComponentLink2URL=http://www.kemet.com/kemet/web/homepage/kechome.nsf/vapubfilesname/F3102TA.pdf/$file/F3102TA.pdf, DatasheetDocument=Mar-2001, LatestRevisionDate=19-Mar-2004, LatestRevisionNote="Silkscreen size reduced.", Note="Footprint corresponds to dimensions for bulk cassette packaging. This case size has tightened tolerances.", PackageReference=0603, Published=17-Jul-2002, Publisher="Altium Limited"
C9 C10 C11 C18 C29 C35 C43 C47 C52: "Ceramic Chip Capacitor - Standard", PackageDocument=Mar-2001, ComponentLink1Description="Manufacturer Link", ComponentLink1URL=http://www.kemet.com/, ComponentLink2Description=Datasheet, ComponentLink2URL=http://www.kemet.com/kemet/web/homepage/kechome.nsf/vapubfilesname/F3102TA.pdf/$file/F3102TA.pdf, DatasheetDocument=Mar-2001, LatestRevisionDate=19-Mar-2004, LatestRevisionNote="Silkscreen size reduced.", Note="Footprint corresponds to dimensions for bulk cassette packaging. This case size has tightened tolerances.", Published=17-Jul-2002, Publisher="Altium Limited"
  C9 C10 C35: Code_IPC=2012[0805], Code_JEITA=0805, PackageReference=0805
  C11 C18 C29 C43 C47 C52: Code_IPC="1608 [0603]", Code_JEITA=0603, PackageReference=0603
C54 C57 C70 C73 C81 C90 C93 C94: library part C0805, "Ceramic Chip Capacitor - Standard", PackageDocument=Mar-2001, Code_IPC=2012[0805], Code_JEITA=0805, ComponentLink1Description="Manufacturer Link", ComponentLink1URL=http://www.kemet.com/, ComponentLink2Description=Datasheet, ComponentLink2URL=http://www.kemet.com/kemet/web/homepage/kechome.nsf/vapubfilesname/F3102TA.pdf/$file/F3102TA.pdf, DatasheetDocument=Mar-2001, LatestRevisionDate=19-Mar-2004, LatestRevisionNote="Silkscreen size reduced.", Note="Footprint corresponds to dimensions for bulk cassette packaging. This case size has tightened tolerances.", PackageReference=0805, Published=17-Jul-2002, Publisher="Altium Limited"
C83 C84 C85 C86 C87: library part 293D156X0004B2, "Tantamount Commercial, Surface Mount Solid Tantalum Chip Capacitor: 15uF, 20% Tolerance, 4 WVDC @ +85°C, Surge = 5.2V", Code_JEITA=3528, ComponentLink1Description="Manufacturer Link", ComponentLink1URL=http://www.vishay.com/, ComponentLink2Description=Datasheet, ComponentLink2URL=http://www.vishay.com/docs/40002/293d.pdf, DatasheetDocument=05-Feb-2003, Note="See Data Sheet for full range of components", PackageReference=3528, Published=19-Mar-2004, Publisher="Altium Limited"
D1: "Surface Mount Chip LED, Red", LED_Colour=Red, ComponentLink1Description="Manufacturer Link", ComponentLink1URL=http://www.avagotech.com/, ComponentLink2Description=Datasheet, ComponentLink2URL=http://cp.literature.agilent.com/litweb/pdf/5988-6271EN.pdf, DatasheetVersion=30-Apr-2002, LatestRevisionDate=27-Jun-2008, LatestRevisionNote="Polarity swapped to match Anode Mark.", LuminousIntensity="6.3mcd (Minimum).", Note="Anode mark shown on package.", PackageDescription="SM LED; 2 Flat Leads", PackageReference=1.6X0.8X0.8A, PackageVersion=Mar-2002, PCB_Layout="Complies with manufacturer's recommendation.", Published=11-Dec-2002, Publisher="Altium Limited"
D2: library part SMMSD301T1G, "Schottky Barrier Diode, 2-Pin SOD-123, Pb-Free, Tape and Reel", Manufacturer="On Semiconductor", Supplier Part Number 1=SMMSD301T1G-ND, ComponentLink1Description="Manufacturer URL", ComponentLink1URL=http://www.onsemi.com/, ComponentLink2Description=Datasheet, ComponentLink2URL=http://www.onsemi.cn/pub_link/Collateral/MMSD301T1-D.PDF, ComponentLink3Description="Package Specification", ComponentLink3URL=http://www.onsemi.com/pub_link/Collateral/425-04.PDF, Configuration=Single, DatasheetVersion="Rev. 6", Mounting Technology="Surface Mount", PackageDescription="2-Pin SOD, Body 1.6 x 2.69 mm", PackageReference=SOD-123-2-425-04, PackageVersion="Rev. G, 10/2009", Packing="Tape and Reel", PartNumber=SMMSD301T1G, RoHS=TRUE, Supplier 1=Digi-Key, Supplier 2=Mouser, Supplier Part Number 2=863-SMMSD301T1G
L1 L2 L3 L5 L7 L8 L9 L10: library part Inductor_SMD, "Inductor", Code_IEC=1005, Code_JEITA=0402, LatestRevisionDate=29-May-2009, LatestRevisionNote="IPC-7351 Footprint Added.", PackageDescription="Chip Inductor", PackageReference=0402-A, Published=8-Jun-2000, Publisher="Altium Limited"
L4: "WE-LQS SMD Power Inductor, L=4.7 µH", Inductance="4.7 µH", ComponentLink1Description="Manufacturer URL", ComponentLink1URL=http://www.we-online.com, ComponentLink2Description=Datasheet, ComponentLink2URL=http://katalog.we-online.de/pbs/datasheet/74404024047.pdf, PackageReference="WE-LQS 252012", PartNumber=74404024047
P1 P2 P3: library part "Header 2", "Header, 2-Pin", LatestRevisionDate=17-Jul-2002, LatestRevisionNote="Re-released for DXP Platform.", Publisher="Altium Limited"
P4: library part TS_Connector, "10 pin PFC connector bottom"
P7: library part "Header 4X2", "Header, 4-Pin, Dual row", LatestRevisionDate=17-Jul-2002, LatestRevisionNote="Re-released for DXP Platform.", Publisher="Altium Limited"
P8: library part "TFT LCD Connector", "40 pin pfc connector bottom"
P9: library part "Header 3", "Header, 3-Pin", LatestRevisionDate=17-Jul-2002, LatestRevisionNote="Re-released for DXP Platform.", Publisher="Altium Limited"
P10: library part "Header 5X2", "Header, 5-Pin, Dual row", LatestRevisionDate=17-Jul-2002, LatestRevisionNote="Re-released for DXP Platform.", Publisher="Altium Limited"
P11 P12: library part "Header 8", "Header, 8-Pin", LatestRevisionDate=17-Jul-2002, LatestRevisionNote="Re-released for DXP Platform.", Publisher="Altium Limited"
Q1 Q2 Q3 Q4: library part BSS123, "N-channel Enhancement Mode Vertical D-MOSFET", ComponentLink1Description="Manufacturer Link", ComponentLink1URL=http://www.semiconductors.philips.com/, ComponentLink2Description=Datasheet, ComponentLink2URL=http://www.semiconductors.philips.com/acrobat/datasheets/BSS123_3.pdf, DatasheetVersion=Apr-1995, LatestRevisionDate=12-Dec-2006, LatestRevisionNote="IPC-7351 Footprint Added.", PackageDescription="3-Pin SOT-23 Package 0.95 mm Pitch, 2.3 mm Lead Span", PackageReference=SOT23, PackageVersion=May-1999, Published=17-Sep-2003, Publisher="Altium Limited"
R1 R2 R3 R4 R5 R6 R7 R8 R9 R10 R11 R14 R15 R16 R17 R18 R19 R20: library part ERJ2GE, "Thick Film Chip Resistor, 1 Ohm to 2.2M Ohm Range, 5% Tolerance, 0402 Size, 0.063 W", PackageDocument=Mar-2003, Code_IPC="1005 [0402]", ComponentLink1Description="Manufacturer Link", ComponentLink1URL=http://www.panasonic.com/industrial/components/resistive_products.htm, ComponentLink2Description=Datasheet, ComponentLink2URL=http://www.panasonic.com/industrial/components/pdf/AOA0000CE1.pdf, LatestRevisionDate=19-Mar-2004, LatestRevisionNote="Silkscreen size reduced.", Note="If flow soldering, adjust pad width of PCB Footprint to 0.7 - 0.8 times the width of the resistor.", PackageReference=2-0402, Published=17-Dec-2003, Publisher="Altium Limited"
R12 R13 R21 R22 R23 R24 R25 R26 R27 R28 R29 R30 R31 R32 R33 R34 R35 R36 R37 R38 R39 R40 R41 R42 R43 R44 R57 R58 R59 R60 R61: library part ERA3Y, "Rectangular Thick Film Chip Resistor, 10 Ohm to 330k Ohm Range, 0.1% and 0.5% Tolerance, 0603 Size, 0.063 W", PackageDocument=Mar-2003, Code_IPC="1608 [0603]", ComponentLink1Description="Manufacturer Link", ComponentLink1URL=http://www.panasonic.com/industrial/components/resistive_products.htm, ComponentLink2Description=Datasheet, ComponentLink2URL=http://www.panasonic.com/industrial/components/pdf/AOA0000CE8.pdf, LatestRevisionDate=19-Mar-2004, LatestRevisionNote="Silkscreen size reduced.", Note="If flow soldering, adjust pad width of PCB Footprint to 0.7 - 0.8 times the width of the resistor.", PackageReference=ERA-0603, Published=17-Dec-2003, Publisher="Altium Limited"
R45 R46 R48 R51 R52 R53 R54 R55: library part ERAV, "Metal Film Thermosensitive Chip Resistor, 0.56 Ohm to 10k Ohm Range, 5% Tolerance, 0603 Size, 0.063 W", PackageDocument=Mar-2003, Code_IPC="1608 [0603]", ComponentLink1Description="Manufacturer Link", ComponentLink1URL=http://www.panasonic.com/industrial/components/resistive_products.htm, ComponentLink2Description=Datasheet, ComponentLink2URL=http://www.panasonic.com/industrial/components/pdf/AOF0000CE1.pdf, LatestRevisionDate=19-Mar-2004, LatestRevisionNote="Silkscreen size reduced.", Note="If flow soldering, adjust pad width of PCB Footprint to 0.7 - 0.8 times the width of the resistor.", PackageReference=ERA-0603, Published=17-Dec-2003, Publisher="Altium Limited"
R47: library part ERAS, "Metal Film Thermosensitive Chip Resistor, 0.56 Ohm to 10k Ohm Range, 5% Tolerance, 0805 Size, 0.1 W", PackageDocument=Mar-2003, Code_IPC="2012 [0805]", ComponentLink1Description="Manufacturer Link", ComponentLink1URL=http://www.panasonic.com/industrial/components/resistive_products.htm, ComponentLink2Description=Datasheet, ComponentLink2URL=http://www.panasonic.com/industrial/components/pdf/AOF0000CE1.pdf, LatestRevisionDate=19-Mar-2004, LatestRevisionNote="Silkscreen size reduced.", Note="If flow soldering, adjust pad width of PCB Footprint to 0.7 - 0.8 times the width of the resistor.", PackageReference=ERA-0805, Published=17-Dec-2003, Publisher="Altium Limited"
U1: library part STM32F74XZXT, "STM32F746ZET ARM Cortex M7 microcontroller", Manufacturer_Part_Number=stm32f74xzxt, C="Copyright (C) 2016 Accelerated Designs. All rights reserved", Copyright="Copyright (C) 2016 Accelerated Designs. All rights reserved", RefDes=RefDes, Type=Type, Vendor=STMicroelectronics
U2: "128Mb PC133 SDR SDRAM, 4Mb x 32, 6ns, 3.3V, 0 to 70 degC, 86-Pin TSOP, Pb-Free", Manufacturer=Micron, Op. Temp.="0C to +70C", Voltage=3.3V, CL="CL = 3", Clock Rate="166 MHz", ComponentLink1Description="Manufacturer URL", ComponentLink1URL=http://www.micron.com/, ComponentLink2Description=Datasheet, ComponentLink2URL=http://www.micron.com/~/media/Documents/Products/Data%20Sheet/DRAM/128mb_x32_sdram.pdf, ComponentLink3Description="Package Specification", ComponentLink3URL=http://www.micron.com/~/media/Documents/Products/Data%20Sheet/DRAM/128mb_x32_sdram.pdf, Cycle Time=6ns, Data Rate=PC133, DatasheetVersion=Rev.Q, Density=128Mb, Depth=4Mb, Mounting Technology="Surface Mount", PackageDescription="86-PinThin Small Outline Package, 10.16 x 22.22 mm, Pitch 0.5 mm", PackageReference=MICT-P-86, PackageVersion=Rev.Q, PartNumber=MT48LC4M32B2P-6A, RoHS=Yes, Width=x32
U3 U5: "Schmitt-Trigger Inverter / Logic Level Shifter with LSTTL-Compatible Inputs", ComponentLink1Description="Manufacturer Link", ComponentLink1URL=http://www.onsemi.com/, ComponentLink2Description=Datasheet, ComponentLink2URL=http://www.onsemi.com/pub/Collateral/MC74VHC1GT14-D.PDF, DatasheetVersion=Nov-1999, LatestRevisionDate=12-Dec-2006, LatestRevisionNote="IPC-7351 Footprint Added.", Note="Pin 1 is NC and is not drawn.", PackageDescription="5-Pin SOT-353 Package 0.65 mm Pitch, 2.1 mm Lead Span", PackageReference=419A-01, PackageVersion=Oct-1999, Published=15-Apr-2002, Publisher="Altium Limited"
U4: library part ULN2003D, "Seven Darlington Array", Code_IPC=SOIC127P600-16, ComponentLink1Description="Manufacturer Link", ComponentLink1URL=http://www.st.com/, ComponentLink2Description=Datasheet, ComponentLink2URL=http://www.st.com/stonline/products/literature/ds/5279/uln2001.pdf, DatasheetVersion=Sep-1998, LatestRevisionDate=13-Apr-2006, LatestRevisionNote="IPC-7351 Footprint Added.", PackageDescription="16-Pin Small Outline Integrated Circuit 1.27 mm Pitch", PackageReference=SO16, PackageVersion=May-1998, Published=8-Jun-2000, Publisher="Altium Limited"
U6: "White Led Power Supply For Large Display Backlight, 8-Pin VFDFPN, Tape and Reel", ComponentLink1Description="Manufacturer URL", ComponentLink1URL=http://www.st.com, ComponentLink2Description=Datasheet, ComponentLink2URL=http://www.st.com/internet/com/TECHNICAL_RESOURCES/TECHNICAL_LITERATURE/DATASHEET/CD00098098.pdf, DatasheetVersion=May-2011, PackageDescription="8-Pin Dual Flat No-Lead, 3 x 3 mm Body, 0.65 mm Pitch, Exposed Pad", PackageReference=QFN8, PackageVersion=2011
U8: "Low-Power, Slew-Rate-Limited RS-485/RS-422 Transceiver", Code_IPC=SOIC127P600-8, Code_JEDEC=MS-012-AA, ComponentLink1Description="Manufacturer Link", ComponentLink1URL=http://www.maxim-ic.com/, ComponentLink2Description=Datasheet, ComponentLink2URL=http://pdfserv.maxim-ic.com/en/ds/MAX1487-MAX491.pdf, DatasheetVersion=Feb-1996, LatestRevisionDate=13-Apr-2006, LatestRevisionNote="IPC-7351 Footprint Added.", PackageDescription="8-Pin Small Outline Integrated Circuit 1.27 mm Pitch", PackageReference=NSO8, Published=16-Jan-2001, Publisher="Altium Limited"
U9: "128 K Serial I²C Bus EEPROM", ComponentLink1Description="Manufacturer Link", ComponentLink1URL=http://www.st.com/, DatasheetVersion=Feb-1998, LatestRevisionDate=13-Apr-2006, LatestRevisionNote="IPC-7351 Footprint Added.", PackageDescription="8-Pin Small Outline Integrated Circuit 1.27 mm Pitch", PackageReference=SOP8, PackageVersion=Jul-1999, Published=24-Aug-2001, Publisher="Altium Limited"
U10: "128 Mb (x1/x2/x4) Serial NOR Flash Memory with Multi I/O, 108 MHz, 2.7 to 3.6 V, 8-pin SO8 Wide (SE), Tray", Manufacturer=Micron, Package="SO8 Wide", Voltage=2.7V-3.6V, Applications=Embedded, ComponentLink1Description="Manufacturer URL", ComponentLink1URL=http://www.micron.com/, ComponentLink2Description=Datasheet, ComponentLink2URL=http://www.micron.com/~/media/Documents/Products/Data%20Sheet/NOR%20Flash/Serial%20NOR/N25Q/n25q_128mb_3v_65nm.pdf, ComponentLink3Description="Package Specification", ComponentLink3URL=http://www.micron.com/~/media/Documents/Products/Data%20Sheet/NOR%20Flash/Serial%20NOR/N25Q/n25q_32mb_1_8v_65nm.pdf, DatasheetVersion="Rev. L", Density=128Mb, Mounting Technology="Surface Mount", PackageDescription="8-Pin SO Wide, 5.29 X 5.29 mm, Pitch 1.27 mm", PackageReference=MICT-SE-8, PackageVersion="Rev. E", Part Family=N25Q, PartNumber=N25Q128A13ESE40E, Part Status=Production, RoHS=Yes, Speed="108 MHz", Type="Multi I/O", Width=x1/x2/x4
U11: library part L7805CV, "Positive Voltage Regulator, 5V, 3-Pin TO-220", ComponentLink1Description="Manufacturer URL", ComponentLink1URL=http://www.st.com, ComponentLink2Description=Datasheet, ComponentLink2URL=http://www.st.com/internet/com/TECHNICAL_RESOURCES/TECHNICAL_LITERATURE/DATASHEET/CD00000444.pdf, ComponentLink3Description="Package Specification", ComponentLink3URL=http://www.st.com/internet/com/TECHNICAL_RESOURCES/TECHNICAL_LITERATURE/PACKAGE_INFORMATION/CD00004649.pdf, DatasheetVersion=Nov-2011, PackageDescription="TO, Thru-Hole, Vertical, Heatsink Mounted; 3 In-Line Leads; Pitch 2.54 mm", PackageReference=TO220, PackageVersion=ver3.0, PartNumber=L7805CV
U12: "800mA and 1A Low Dropout Positive Regulator 2.85V, 3.3V, 5V, and Adjustable", ComponentLink1Description="Manufacturer Link", ComponentLink1URL=http://www.ti.com/, ComponentLink2Description=Datasheet, ComponentLink2URL=http://www-s.ti.com/sc/ds/REG1117.pdf, DatasheetVersion=Sep-1997, LatestRevisionDate=17-Jul-2002, LatestRevisionNote="Re-released for DXP Platform.", PackageDescription="SOT-223/SC-73; 4 Leads; Body 6.7 x 7.3 mm, inc. leads (LxW max)", PackageReference=ZZ311, PackageVersion=revC, Published=8-Jun-2000, Publisher="Altium Limited"
Y1: "Crystal Oscillator", ComponentLink1Description="Manufacturer Link", ComponentLink1URL=http://www.ecsxtal.com/, ComponentLink2Description=Datasheet, ComponentLink2URL=http://www.ecsxtal.com/pdf3/CSM_7.pdf, DatasheetDocument=18-Apr-2000, PackageReference=CSM-7, Published=17-Jul-2002, Publisher="Altium Limited"
Y2: library part XTAL, "Crystal Oscillator", LatestRevisionDate=17-Jul-2002, LatestRevisionNote="Re-released for DXP Platform.", PackageDescription="Crystal, Thru-Hole; 2 Leads; Body 3.1 x 8.2 mm (Dia.xH)", PackageReference=R38, Published=8-Jun-2000, Publisher="Altium Limited"

## Via types
v1: diameter 30, hole 10, Top Layer to Bottom Layer, 289 vias

## Nets (pads, with @x,y where several pads share a name; then routed paths per layer and width w, separated by ;. In a path a pad name is that pad's centre, name@x,y a point inside that pad or via, vN(x,y) a via of type N, cw(c..) or ccw(c..) an arc to the next point about the centre after c; other vN are vias at no path point)
+3V3: C1.2 C8.2 C66.2 C75.2 C79.2 C80.1 C81.2 C82.2 C87.1 C92.2 C93.2 C94.2 L1.2 L2.1 L5.1 L8.1 L10.2 P8.4 P10.4 R21.1 R23.1 R25.1 R26.1 R28.2 R39.1 R40.2 R46.2 R53.1 R54.2 R55.2 R60.1 R61.1 U3.5 U5.5 U9.8 U10.8 U12.2 U12.4 | length 3210.6
  Top Layer w10: 235,1545 235,1599.95 P8.4@235.05,1600
  Top Layer w20: 235,1545 235,1525 270,1490 v1(290,1490) ; v1(290,1175) 290,1099 295,1094 U3.5@421,1094 ; 399.87,1094 399.87,971.42 415.87,955.41 U5.5@428.65,955.41 ; v1(599,463) 626,490 R40.2@656.54,490 ; R26.1@1270,1436.54 v1(1300,1436.54) R60.1@1390,1436.54 1394.54,1436.54 1429.14,1471.14 U9.8@1429.14,1631.57 1481.57,1631.57 1507,1657 C79.2@1507,1687.54 ; R61.1@1479.34,1950.66 1479.34,1978.34 v1(1484,1983) 1507.34,2006.34 C80.1@1513.66,2006.34 1545,2037.67 1545,2088.58 U10.8@1510.24,2123.34 ; v1(1865,2403) 1891.34,2376.66 R39.1@1891.34,2373.66 ; v1(1930,1074) 1930,1072 1946,1088 1968,1088 2003.46,1123.46 C8.2@2003.46,1135 ; L10.2@1945,1843.46 2027.44,1843.46 C75.2@2029.41,1845.43 2029.41,1866.41 2043.12,1880.12 2142.88,1880.12 v1(2144,1879) ; C8.2@1998.46,1135 L1.2@1998.46,1205 ; R28.2@2044.01,1962.19 2050.81,1962.19 v1(2072,1941) ; C66.2@2260,835.91 C66.2@2261.02,834.88
  Top Layer w30: C1.2@921.54,1005 921.54,936.93 L2.1@925,933.46 ; C66.2@2260,835.91 2260,773.27 L8.1@2261.02,772.24 ; C66.2@2261.02,834.88 C66.2@2262.54,833.37 ; R23.1@2330.46,656 R21.1@2330.46,714 2372,714 2386,728 v1(2386,773)
  Bottom Layer w20: 728.46,1505 729.46,1506 v1(800,1506)
  Bottom Layer w30: R46.2@225,1138.46 250.46,1138.46 258,1146 290.54,1146 L5.1@296.54,1140 ; v1(290,1175) 290,1151.54 L5.1@296.54,1145 ; C81.2@715.4,1554 728.46,1540.94 728.46,1505 ; C94.2@1950,902.6 1991.4,902.6 2013.06,880.94 2003.46,871.35 R53.1@2003.46,775 ; C87.1@2060,880.94 2183.06,880.94 2187,877 ; R55.2@2193.46,775 2263.46,775 R54.2@2265,773.46 ; 2264,852 2265,851 R54.2@2265,773.46 ; 2286,1086 2287,1087 U12.2@2287,1160.87 ; 2383,985 2390.6,992.6 C93.2@2470,992.6 2472.6,990 2506,990 2540,1024 C92.2@2540,1126.54 ; v1(2386,773) 2265.46,773 R54.2@2265,773.46
  other v1: 2261,802 922,971
+5V: C44.2 C72.2 C85.1 C86.1 C89.2 C90.2 C91.2 L9.2 P10.2 P11.8 P12.4 P12.5 R51.1 R52.2 U11.3 U12.3 | length 5549
  Top Layer w30: P11.8@810,1020 810,1030 858.46,1078.46 C44.2@858.46,1105 ; P12.5@1820,720 P12.4@1820,620 1885,620 ; v1@1879,473 1885,479 1885,620 ; C72.2@1941.54,560 1940,561.54 L9.2@1940,620 1885,620 ; C86.1@2258,1344.95 2364.95,1344.95 U11.3@2370,1350 2415,1350 2428.46,1336.54 C89.2@2480,1336.54
  Power w50: P10.2@373.58,1908.58 430,1852.16 430,1710 390,1670 390,1242 541,1091 817,1091 ; P11.8@817,1016 817,1091 ; v1(2080,1096) 2081,1095 2324,1095 ; U11.3@2370,1350 2370,1221 2324,1175 2324,1095 ; 817,1091 1043,1091 1230,904 1636,904 P12.5@1820,720 1946,720 2157,509 2223,509 2324,610 2324,1095
  Bottom Layer w20: v1@1881,473 1881,401 1902,380 1991,380 2003.46,392.46 R51.1@2003.46,420
  Bottom Layer w30: R51.1@2003.46,420 R52.2@2076.54,420 ; C90.2@2043,1096.6 2087.6,1096.6 2095.54,1104.54 C91.2@2115,1104.54 ; U12.3@2377.55,1160.87 2379,1162.32 2379,1244 2370,1253 U11.3@2370,1350 2425,1350 2454.06,1320.94 C85.1@2500,1320.94
  other v1: 1880,472
+12V: C83.1 C84.1 C88.2 P12.3 U11.1 | length 1906.4
  Top Layer w30: v1(1877,961) v1(1877,1073) ; C83.1@2220,1740.95 C84.1@2365,1740.94 2370,1735.95 U11.1@2370,1550 2383.46,1563.46 C88.2@2480,1563.46
  Bottom Layer w30: P12.3@1820,520 1850,520 1879,549 v1@1879,961 ; v1@1875,1073 1875,1124 1987,1236 2221,1236 2268,1283 2268,1514 2304,1550 U11.1@2370,1550
AMBIENT_LIGHT: C45.2 R30.1 U1.29 | length 353.7
  Top Layer w10: v1(1840,1940) 1840.15,1940 R30.1@1955.62,2055.48
  Top Layer w20: C45.2@1901.34,2106.34 R30.1@1952.2,2055.48
  Bottom Layer w10: U1.29@1743.68,1886.95 1766.73,1910 1808.79,1910 1838.79,1940 v1(1840,1940)
COOLING_VALVE: P11.4 R36.2 | length 103.2
  Top Layer w20: R36.2@737,693 P11.4@810,620
COOLING_VL: U1.116 U4.4 | length 1927.9
  Top Layer w10: v1(160,1390) 160,1346.21 187.5,1318.71 187.5,1264.93 210,1242.43 210,864.43 302.5,771.93 302.5,737.5 330,710 U4.4@371.02,710 ; v1@615,1925 v1(616,1924) v1(784,1924)
  Bottom Layer w10: v1@160,1385 160,1395 200,1435 200,1743.36 271.64,1815 409.64,1815 518.64,1924 v1(616,1924) ; v1(784,1924) 784,1917 792,1925 820.69,1925 U1.116@859.06,1886.63
EEPROM_NCS: R60.2 U1.87 U9.7 | length 639.2
  Top Layer w10: U9.7@1379.14,1631.57 1379.14,1580.86 1390,1570 v1(1390,1560) R60.2@1390,1503.46
  Bottom Layer w10: U1.87@1054.67,1392.81 1088.86,1427 1207,1427 1265,1485 1265,1534.21 1252,1547.21 1252,1572 1273,1593 1366,1593 1390,1569 v1(1390,1560)
FAN_HIGH: U1.113 U4.6 U4.7 | length 2048.9
  Top Layer w10: v1(125,1315) 140,1315 155,1300 155,1255 180,1230 180,852 272.5,759.5 272.5,662.5 325,610 U4.6@371.02,610 U4.7@371.02,560 ; v1@580,1890 581,1891 v1(751,1891)
  Bottom Layer w10: v1(125,1315) 215,1405 215,1737.15 277.85,1800 415.85,1800 508.52,1892.67 v1(581,1892.67) ; v1@751,1895 751,1891.67 748,1888.67 773.51,1888.67 U1.113@817.3,1844.88
FAN_LOW: U1.111 U4.1 | length 1594.7
  Top Layer w10: v1(230,1315) 230,1270 240,1260 240,876.85 256.85,860 U4.1@371.02,860 ; v1@525,1825 v1(685,1825)
  Bottom Layer w10: v1@230,1320 245,1335 245,1724.72 290.28,1770 428.28,1770 488.28,1830 v1(520,1830) ; v1@687,1822 685,1824 v1(685,1825) 731,1825 747,1841 765.5,1841 U1.111@789.46,1817.04
FAN_MIDDLE: U1.112 U4.2 | length 1681.3
  Top Layer w10: v1(200,1345) 202.5,1342.5 202.5,1271.14 225,1248.64 225,870.64 285.64,810 U4.2@371.02,810 ; v1@550,1860 552,1858 v1(718,1858)
  Bottom Layer w10: v1(200,1345) 230,1375 230,1730.93 284.07,1785 422.07,1785 498.4,1861.33 v1(551,1861.33) ; 733,1862 772.34,1862 U1.112@803.38,1830.96
FAN_TRIAC: U1.98 U4.3 | length 2544.5
  Top Layer w10: v1(260,1285) 307,1285 412,1180 447,1180 476,1151 476,1056 460,1040 460,874 439,853 439,769 430,760 U4.3@371.02,760 ; v1@480,1790 v1(485,1790) 675,1790 v1(690,1775)
  Bottom Layer w10: v1(260,1285) 260,1718.51 296.49,1755 450,1755 v1(485,1790) ; v1(690,1775) 690,1765 720,1735 769,1735 845,1811 976.21,1811 1022.21,1857 1090.57,1857 1108,1839.57 1108,1805 1025,1722 987,1722 929,1664 929,1573.37 U1.98@901.55,1545.92
FANCOIL_LED: P11.3 R37.2 | length 168.3
  Top Layer w20: R37.2@723.46,630 750,630 766,614 766,567 P11.3@817,516
FANCOIL_NTC: C51.2 P11.2 R38.2 R40.1 R43.2 | length 294.2
  Top Layer w10: R38.2@720,556.54 R38.2@723.46,560
  Top Layer w20: R43.2@660,430 C51.2@720,430 ; R38.2@720,556.54 C51.2@720,430 ; P11.2@817,416 803,430 C51.2@720,430
FANCOIL_RPM: U1.129 U5.4 | length 2117.9
  Top Layer w10: v1(290,1215) 385,1120 450,1120 460,1110 460,1075 428.65,1043.65 U5.4@428.65,1006.59
  Bottom Layer w10: v1(290,1215) 265,1215 240,1240 128.79,1240 80,1288.79 80,1395 155,1470 155,1762 253,1860 389,1860 499,1970 576.21,1970 631.21,2025 716.21,2025 796.21,2105 1003.64,2105 U1.129@1040.75,2067.9
FANCOIL_TEMP: C49.2 R43.1 U1.28 | length 4727.4
  Top Layer w10: R43.1@660,363.07 558,363.07 487,434.07 487,513 464,536 324,536 250,610 250,745 138,857 138,1048 60,1126 60,1579 82,1601 82,1653 135,1706 135,1774 172,1811 172,1864 230,1922 230,1987 566,2323 604,2323 686,2405 709,2405 746,2442 778,2442 820,2484 863,2484 890,2511 1018,2511 1052,2545 1159,2545 1189,2575 1405,2575 1421,2559 1590,2559 1650,2499 1741,2499 1820,2420 1820,2381 1857,2344 1857,2291 1760,2194 1760,2050 1825,1985 1825,1965 v1(1800,1940)
  Top Layer w20: R43.1@660,363.07 660,286.54 C49.2@666.54,280
  Bottom Layer w10: U1.28@1729.76,1900.86 1768.89,1940 v1(1800,1940)
FANCOIL_ZC: U1.128 U3.4 | length 1901
  Top Layer w10: v1@290,1260 290,1256.21 398.62,1147.59 U3.4@428.65,1147.59
  Bottom Layer w10: v1(290,1255) 135,1255 95,1295 95,1388.79 170,1463.79 170,1755.79 259.21,1845 397.21,1845 507.21,1955 585,1955 640,2010 725,2010 805,2090 990.81,2090 U1.128@1026.83,2053.98
FMC_A0: U1.10 U2.25 | length 2745.4
  Top Layer w10: v1(1720,505) v1(1785,570)
  Bottom Layer w10: U1.10@1480.29,2152.29 1520,2192 1520,2339 1562,2381 1648.43,2381 1700,2329.43 1700,2300 2012.75,1987.25 2012.75,1416.75 1990,1394 1990,1329 1753,1092 1753,602 v1(1785,570) ; U2.25@1521.54,461 1681,461 v1@1725,505
FMC_A1: U1.11 U2.26 | length 2718.4
  Bottom Layer w10: U1.11@1495.39,2139.18 1535,2178.79 1535,2332.79 1568.21,2366 1642.21,2366 1685,2323.21 1685,2293.79 1997.75,1981.04 1997.75,1425.75 1975,1403 1975,1335.21 1738,1098.21 1738,592 1750,580 1750,485 1706.26,441.26 U2.26@1522.54,441.26 U2.26@1521.54,441.26
FMC_A2: U1.12 U2.27 | length 2758.5
  Top Layer w10: v1(1720,410) 1720,465 1715,470 1705,470 1690,485 1690,535 1700,545 v1(1720,545)
  Bottom Layer w10: U1.12@1506.39,2121.39 1550,2165 1550,2326.57 1574.43,2351 1636,2351 1670,2317 1670,2287.57 1982.75,1974.83 1982.75,1435.75 1958,1411 1958,1339.43 1723,1104.43 1723,548 v1(1720,545) ; U2.27@1521.54,421.57 U2.27@1522.54,421.57 1708.43,421.57 v1(1720,410)
FMC_A3: U1.13 U2.60 | length 2478.6
  Bottom Layer w10: U2.60@1088.46,421.57 1145,421.57 1265,541.57 1265,684.44 1342,761.44 1342,829.64 1794,1281.64 1794,1395.36 1937.75,1539.11 1937.75,1956.19 1683.93,2210 1621.89,2210 U1.13@1524.23,2112.34
FMC_A4: U1.14 U2.61 | length 2408.4
  Bottom Layer w10: U2.61@1088.46,441.45 1143.67,441.45 1250,547.79 1250,690.65 1327,767.65 1327,835.85 1779,1287.85 1779,1401.57 1922.75,1545.32 1922.75,1949.97 1682.72,2190 1630,2190 1538.43,2098.43 U1.14@1538.15,2098.43
FMC_A5: U1.15 U2.62 | length 2338.3
  Bottom Layer w10: U2.62@1088.46,460.94 1141.94,460.94 1235,554 1235,696.87 1312,773.87 1312,842.07 1764,1294.07 1764,1407.79 1907.75,1551.53 1907.75,1943.76 1681.51,2170 1637.56,2170 U1.15@1552.07,2084.51
FMC_A6: U1.50 U2.63 | length 1349.7
  Bottom Layer w10: U2.63@1088.46,480.63 1138.48,480.63 1220,562.15 1220,703.08 1297,780.08 1297,848.28 1720,1271.28 1720,1389.52 1677,1432.52 1677,1447 1689,1459 1689,1476.27 U1.50@1660.43,1504.85
FMC_A7: U1.53 U2.64 | length 1282.3
  Bottom Layer w10: U2.64@1088.46,500.31 1136.95,500.31 1205,568.36 1205,709.29 1282,786.29 1282,854.49 1705,1277.49 1705,1376.76 U1.53@1618.67,1463.09
FMC_A8: U1.54 U2.65 | length 1241.2
  Bottom Layer w10: U2.65@1088.46,520 1135.43,520 1190,574.57 1190,715.51 1267,792.51 1267,860.71 1690,1283.71 1690,1363.92 U1.54@1604.75,1449.17
FMC_A9: U1.55 U2.66 | length 1199.7
  Bottom Layer w10: U2.66@1088.46,539.68 1133.9,539.68 1175,580.79 1175,721.72 1252,798.72 1252,866.92 1675,1289.92 1675,1350.08 U1.55@1590.83,1434.25 ; U1.55@1590.83,1435.25 U1.55@1591.33,1434.75
FMC_A10: U1.56 U2.24 | length 1199.4
  Top Layer w10: v1@1585,520 1520,520 1460,580 1436.58,580 1425,591.58 1425,619.37 1510.75,705.12 1510.75,1119.75 1595,1204 1595,1276 v1(1623,1304)
  Bottom Layer w10: U2.24@1521.54,480.63 1565.63,480.63 1575,490 v1(1575,520) ; U1.56@1576.91,1421.33 1605,1393.24 1605,1322 v1@1617,1310
FMC_A11: U1.57 U2.21 | length 1053.6
  Top Layer w10: v1(1455.68,539.68) 1410,585.37 1410,625.59 1495.75,711.33 1495.75,1128.75 1575,1208 1575,1240 v1(1555,1260)
  Bottom Layer w10: v1(1455.68,539.68) U2.21@1521.54,539.68 ; v1(1555,1260) 1560,1260 1585,1285 1585,1385.4 U1.57@1562.99,1407.41
FMC_BA0: U1.89 U2.22 | length 1382
  Top Layer w10: v1(1080,1155) 1097,1155 1117,1135 1117,1098 1340,875 1340,591.21 1411,520.21 v1(1411,520)
  Bottom Layer w10: U1.89@1027.09,1421.33 952,1346.24 952,1268 920,1236 920,1175 965,1130 1055,1130 v1(1080,1155) ; v1(1411,520) 1422.75,508.25 1473.25,508.25 1485,520 U2.22@1521.54,520
FMC_BA1: U1.90 U2.23 | length 1420.9
  Top Layer w10: v1(1087,1118.31) 1087,1102 1325,864 1325,585 1364,546 v1(1364,501)
  Bottom Layer w10: U1.90@1013.17,1435.25 937,1359.08 937,1276 905,1244 905,1168.79 958.79,1115 1071.81,1115 1081.06,1124.25 v1(1087,1118.31) ; v1(1364,501) 1375.75,489.25 1475.47,489.25 1486.53,500.31 U2.23@1521.54,500.31
FMC_D0: U1.85 U2.2 | length 1202.5
  Top Layer w10: v1(1054.25,1195) 1054.25,1109.65 1295,868.9 v1(1295,670)